# Altium PCB Circular PCB.PcbDoc (part 1 of 4)
Units mm, origin at the board's own origin, x right, y up, seen from the top; angles counter-clockwise.
Board outline 100 x 100 mm, 6 copper layers (Top Layer, GND (Top), X, Y, GND (Bot), Bottom Layer), stack 1.599 mm thick; 185 components, 119 nets, 581 pads, 159 vias.
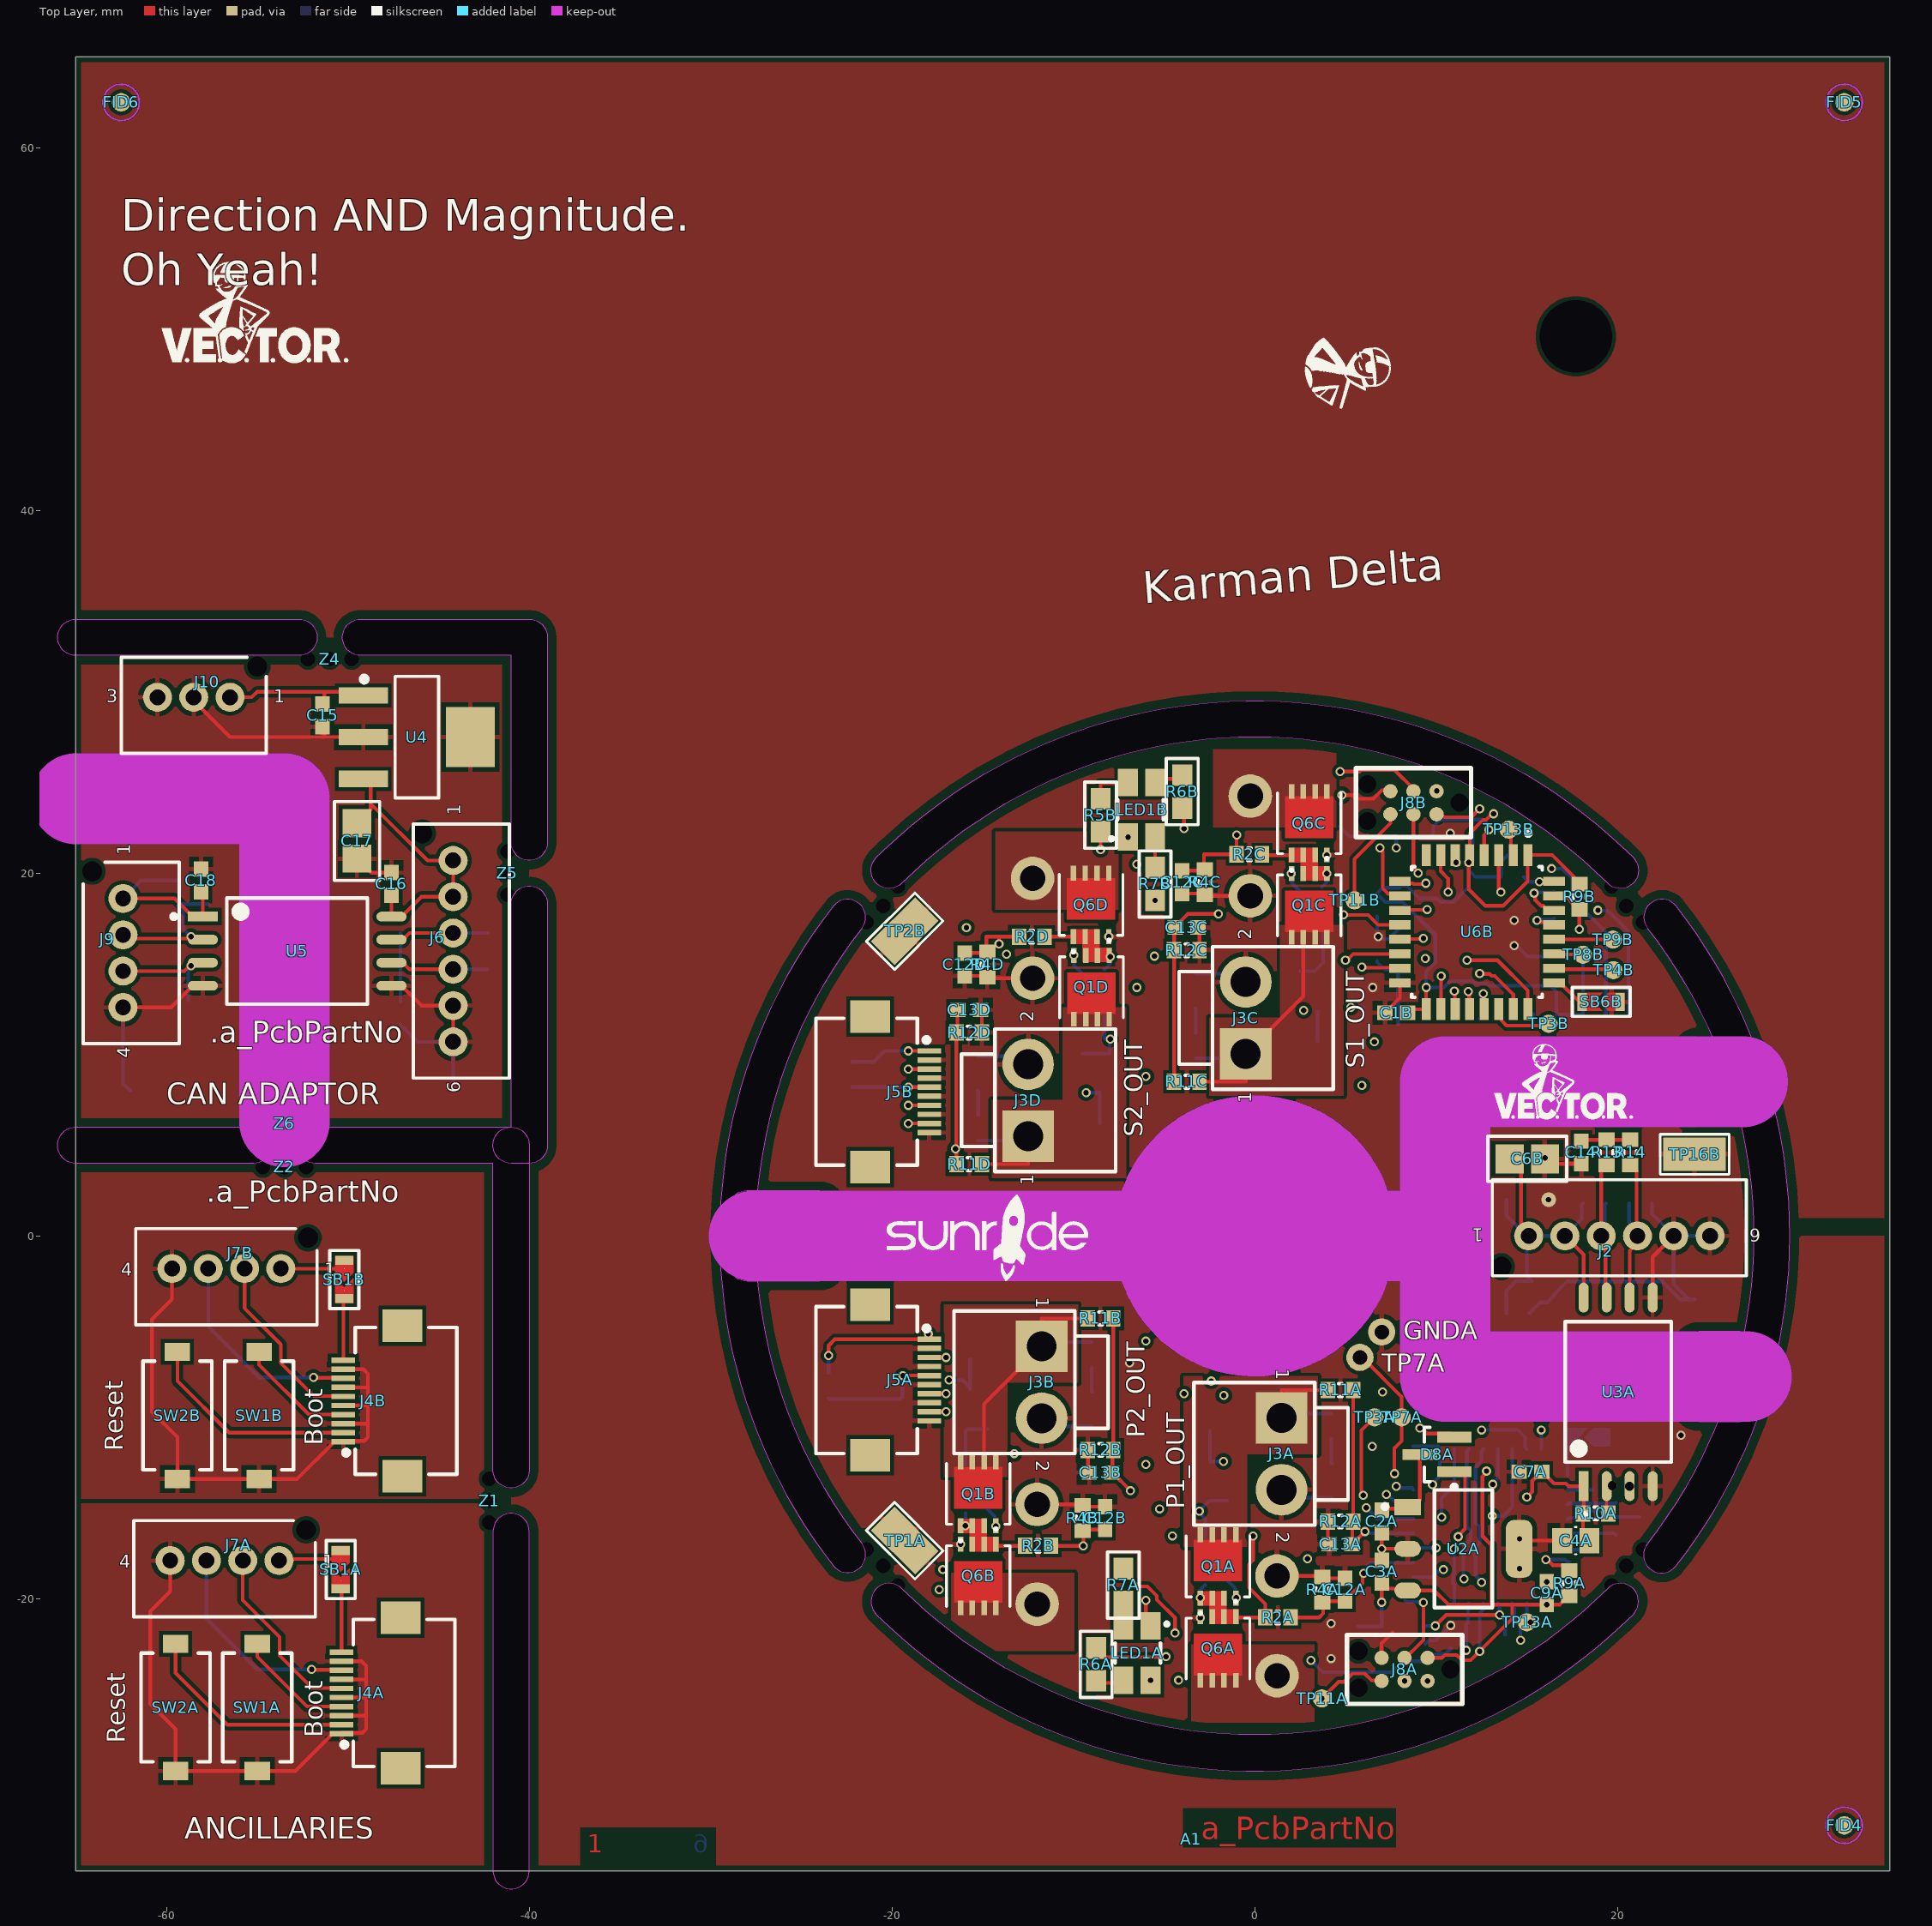
[diagram p0: Top Layer view]
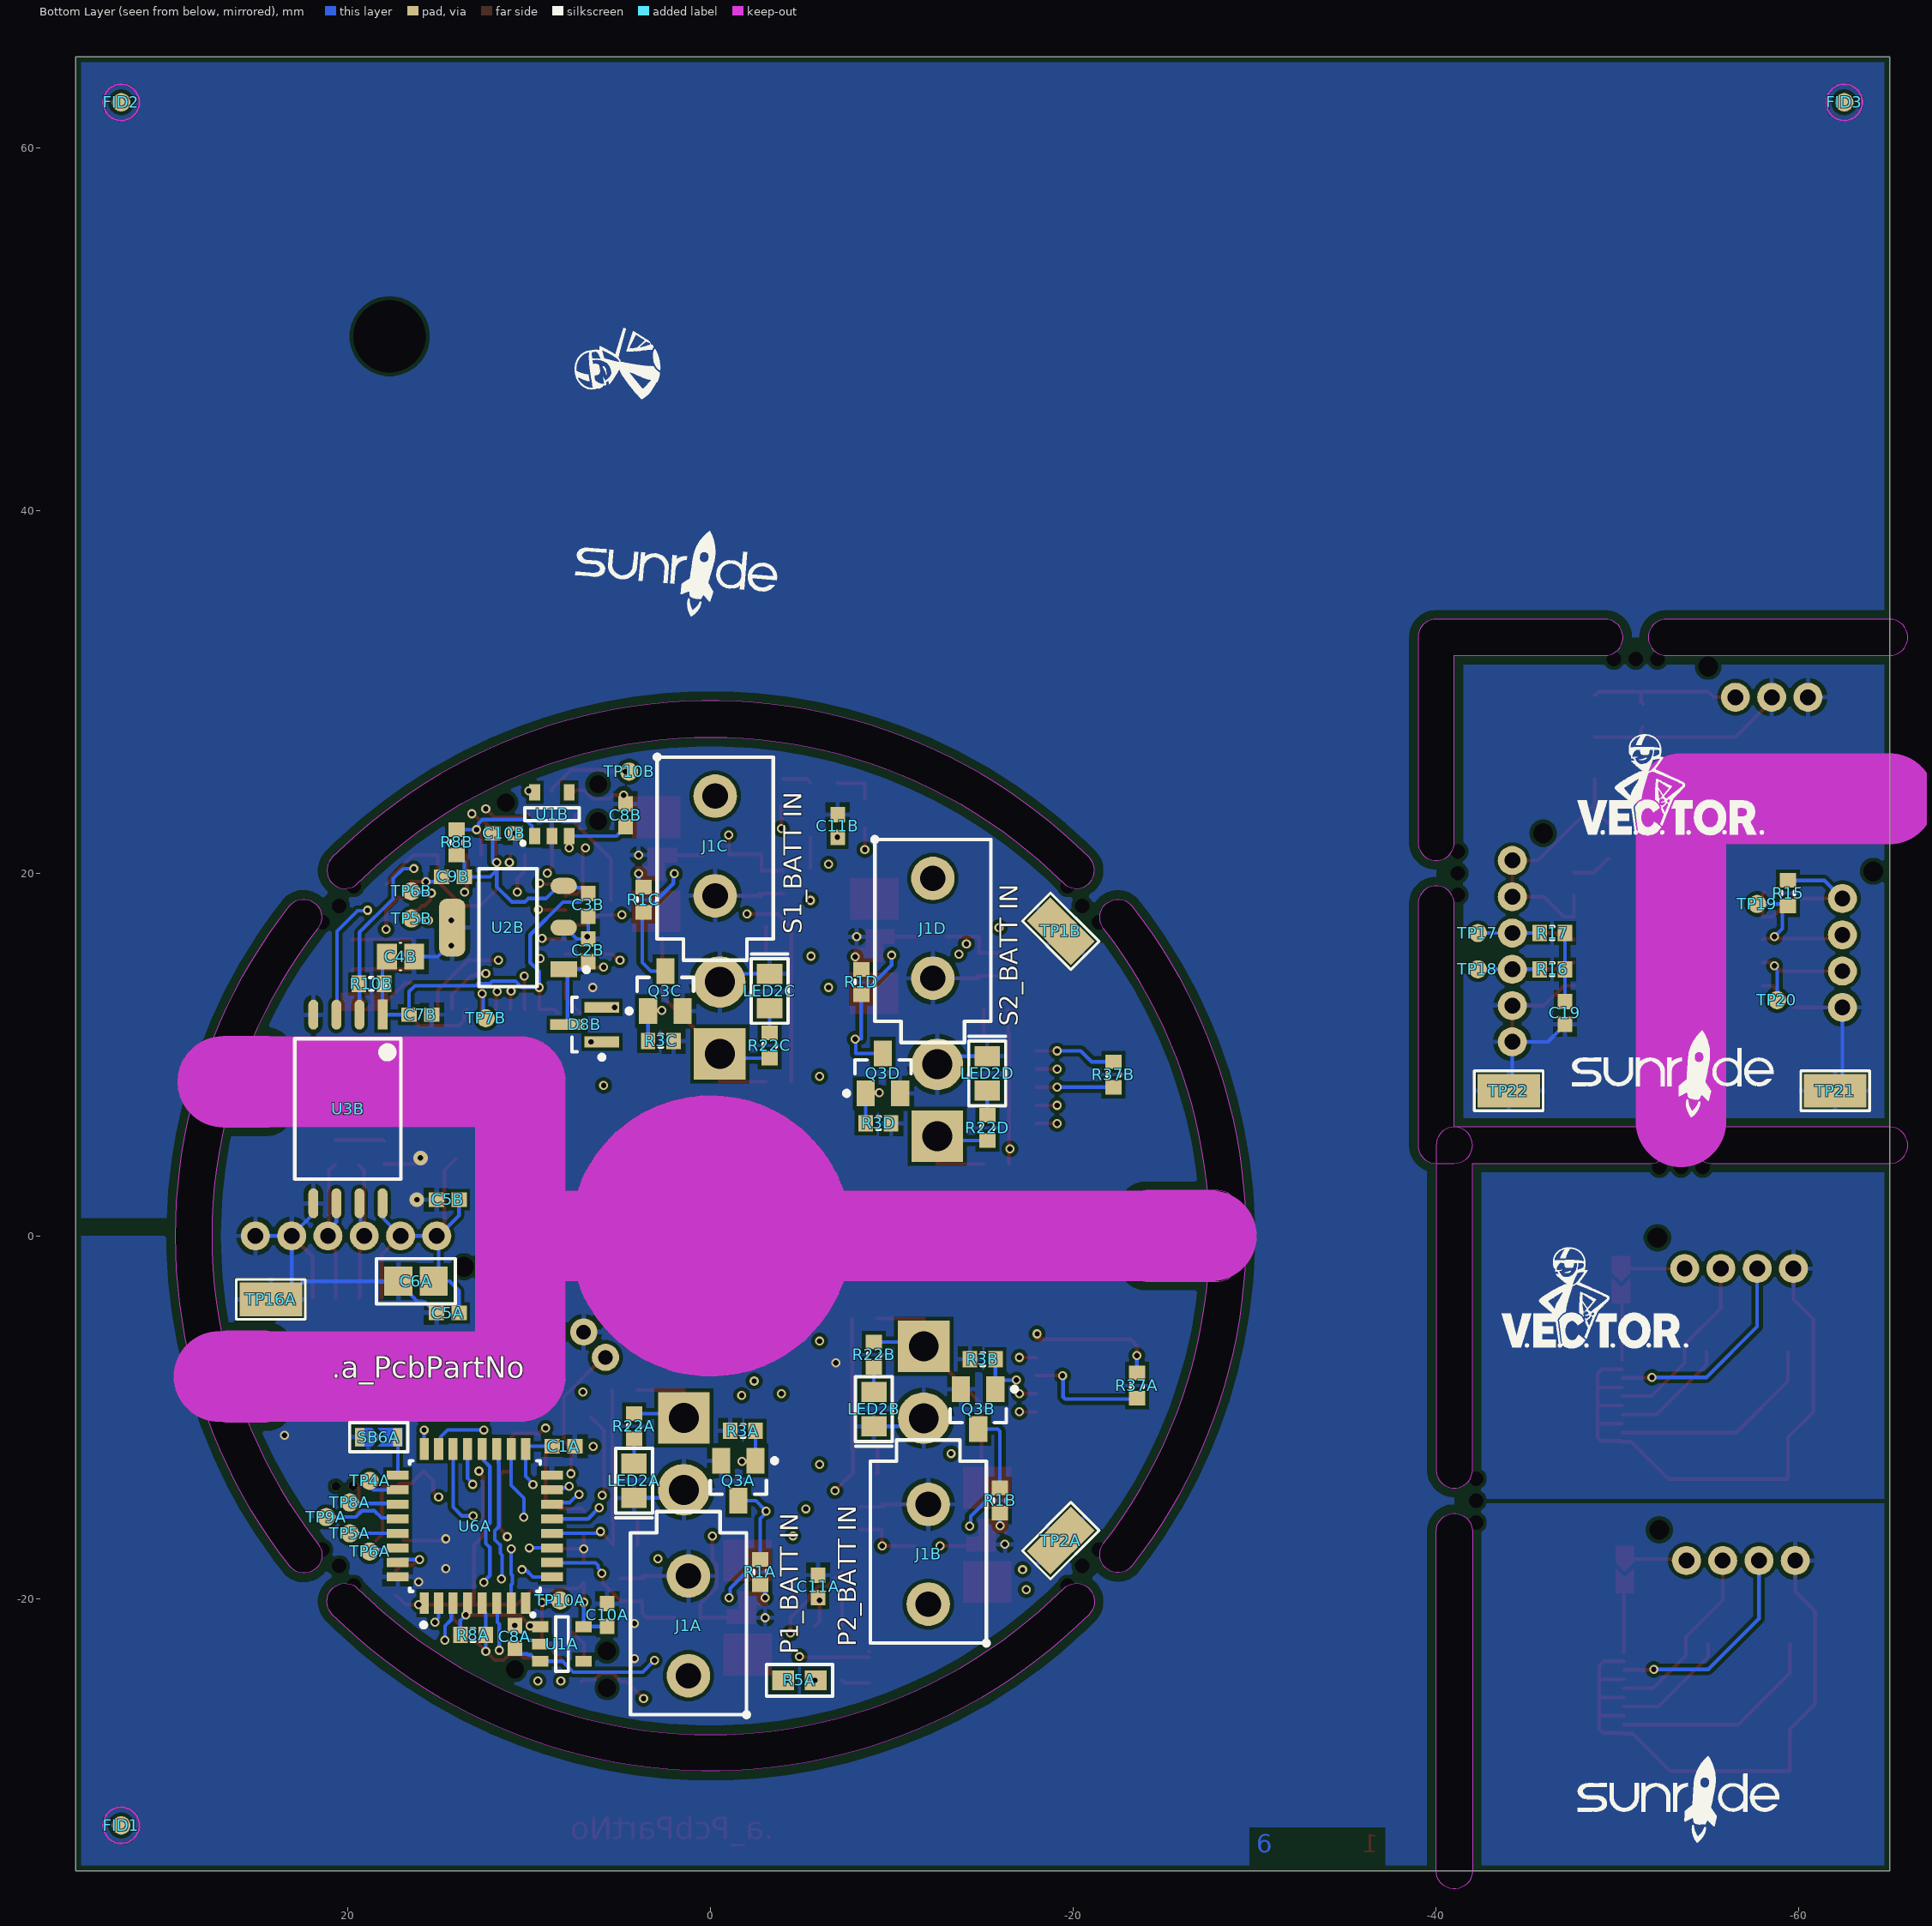
[diagram p1: Bottom Layer view, seen from below]
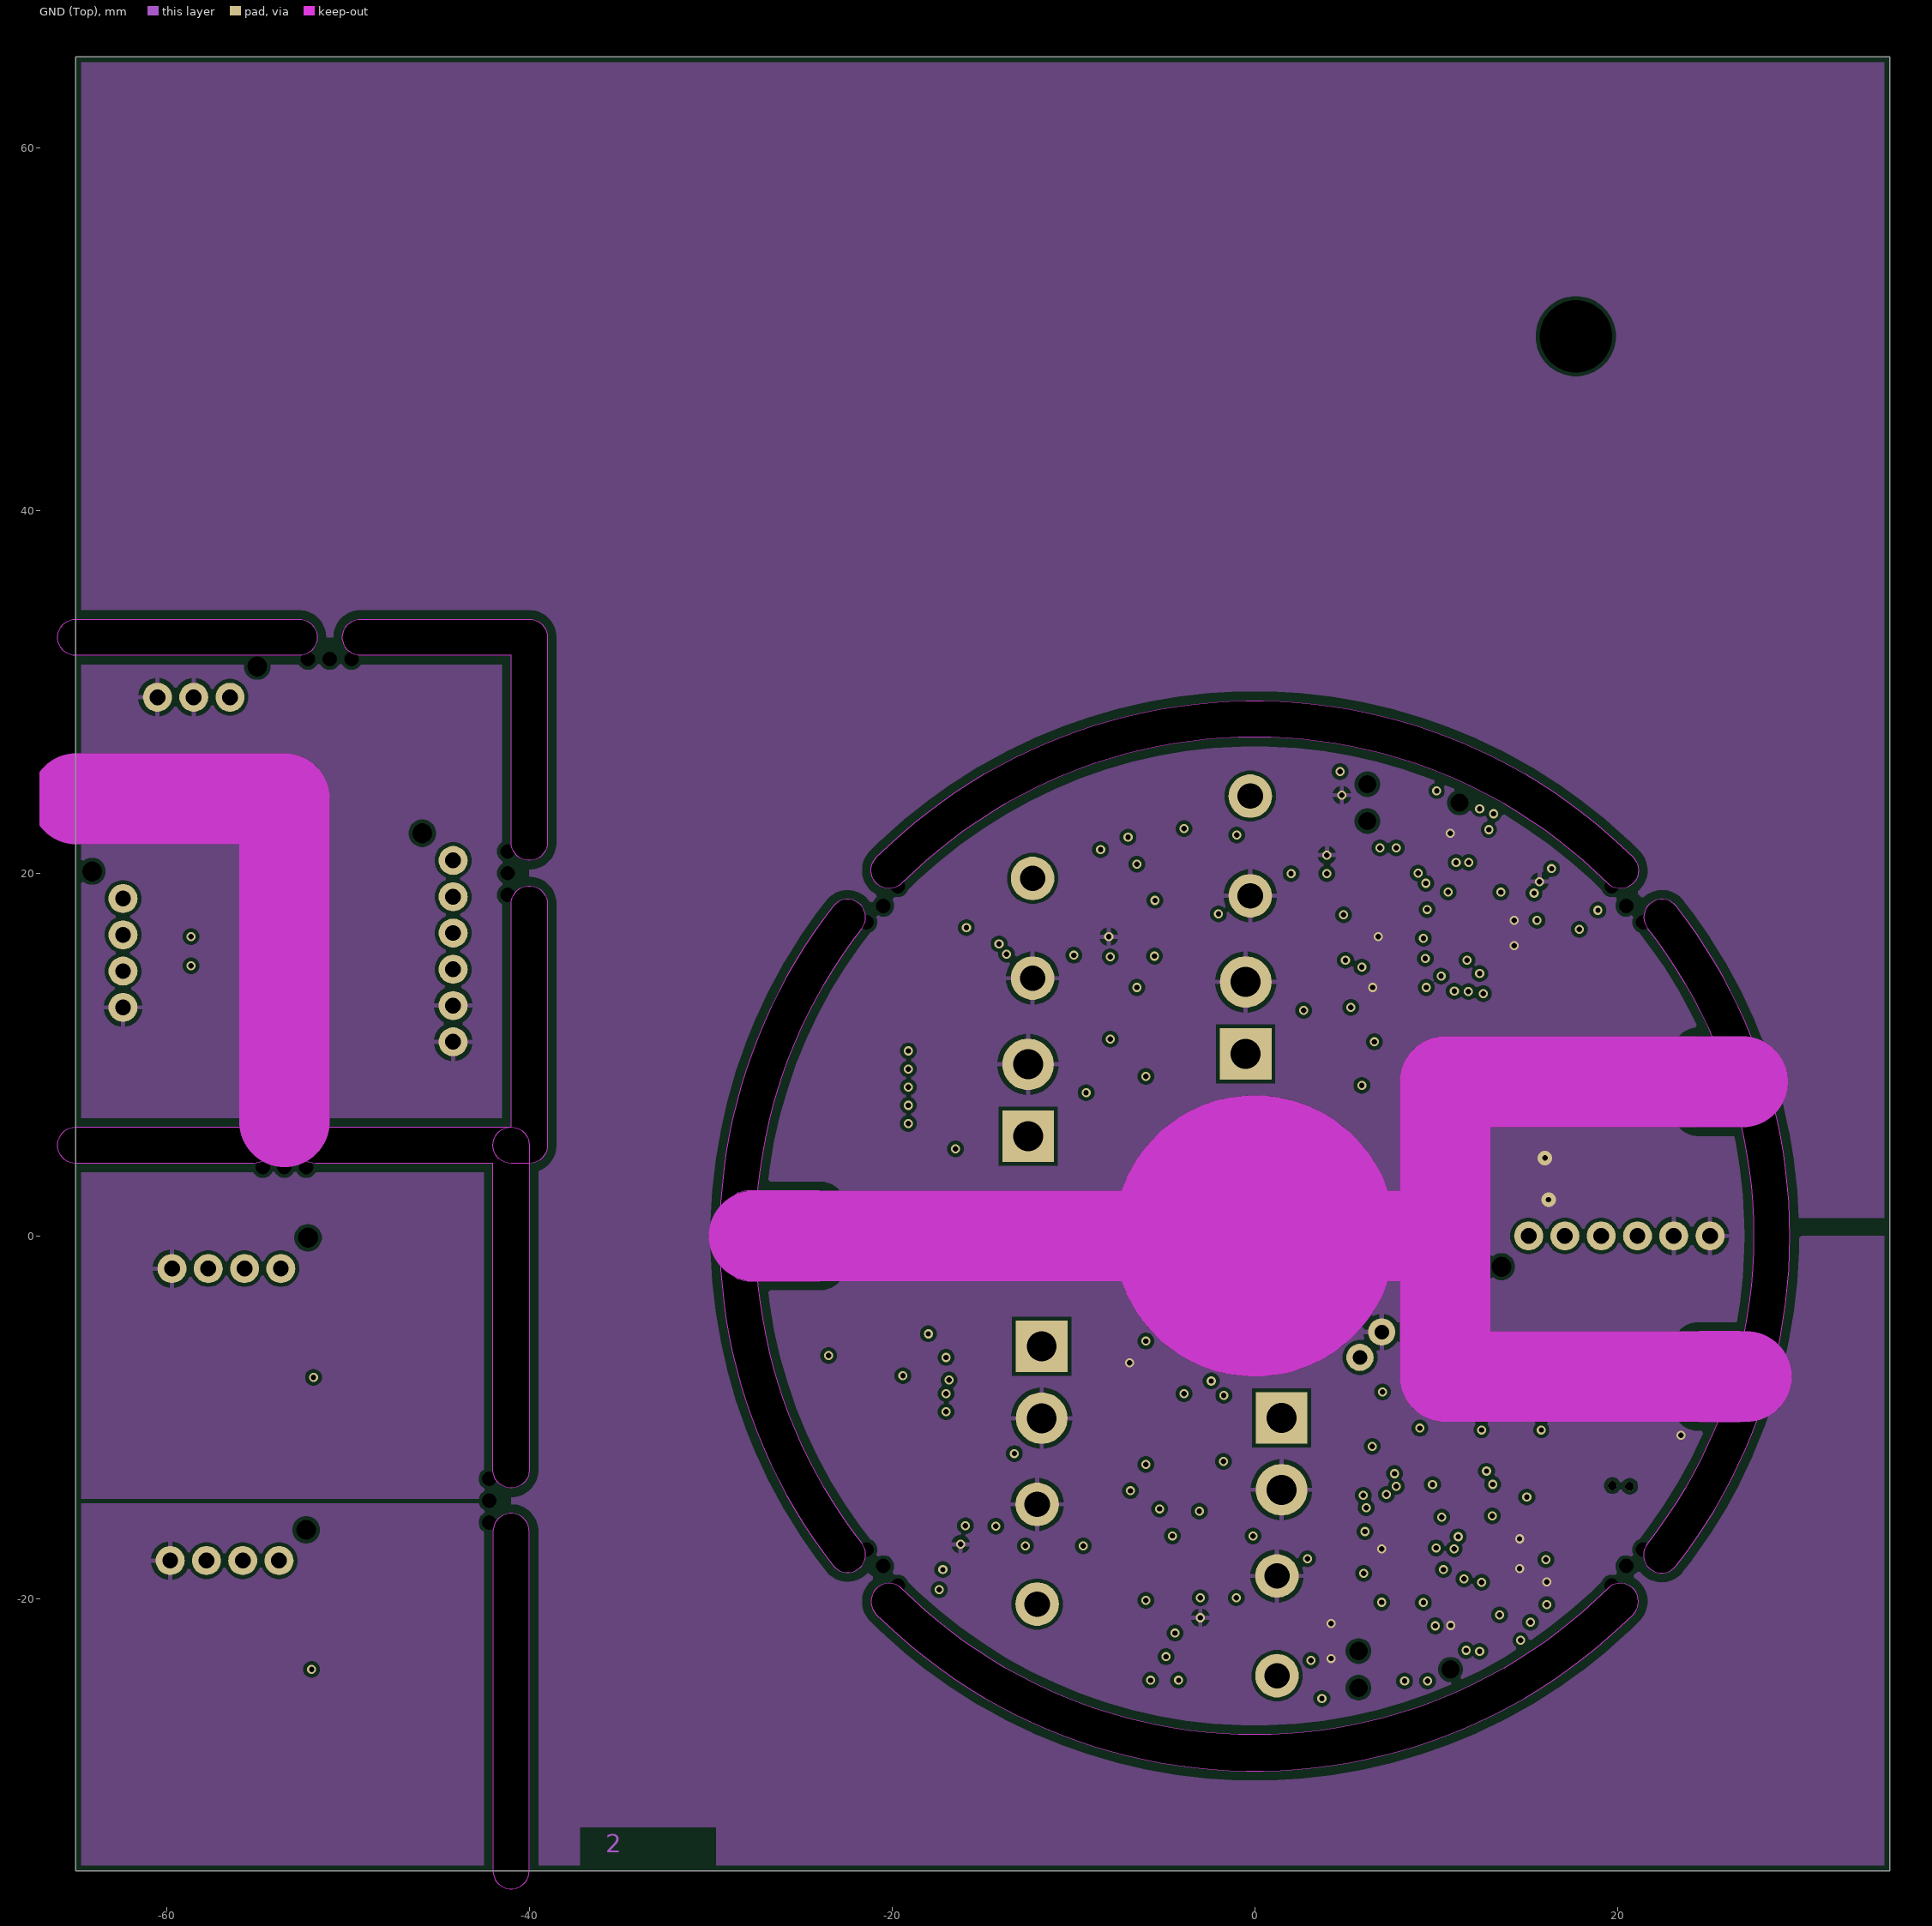
[diagram p2: GND (Top)]
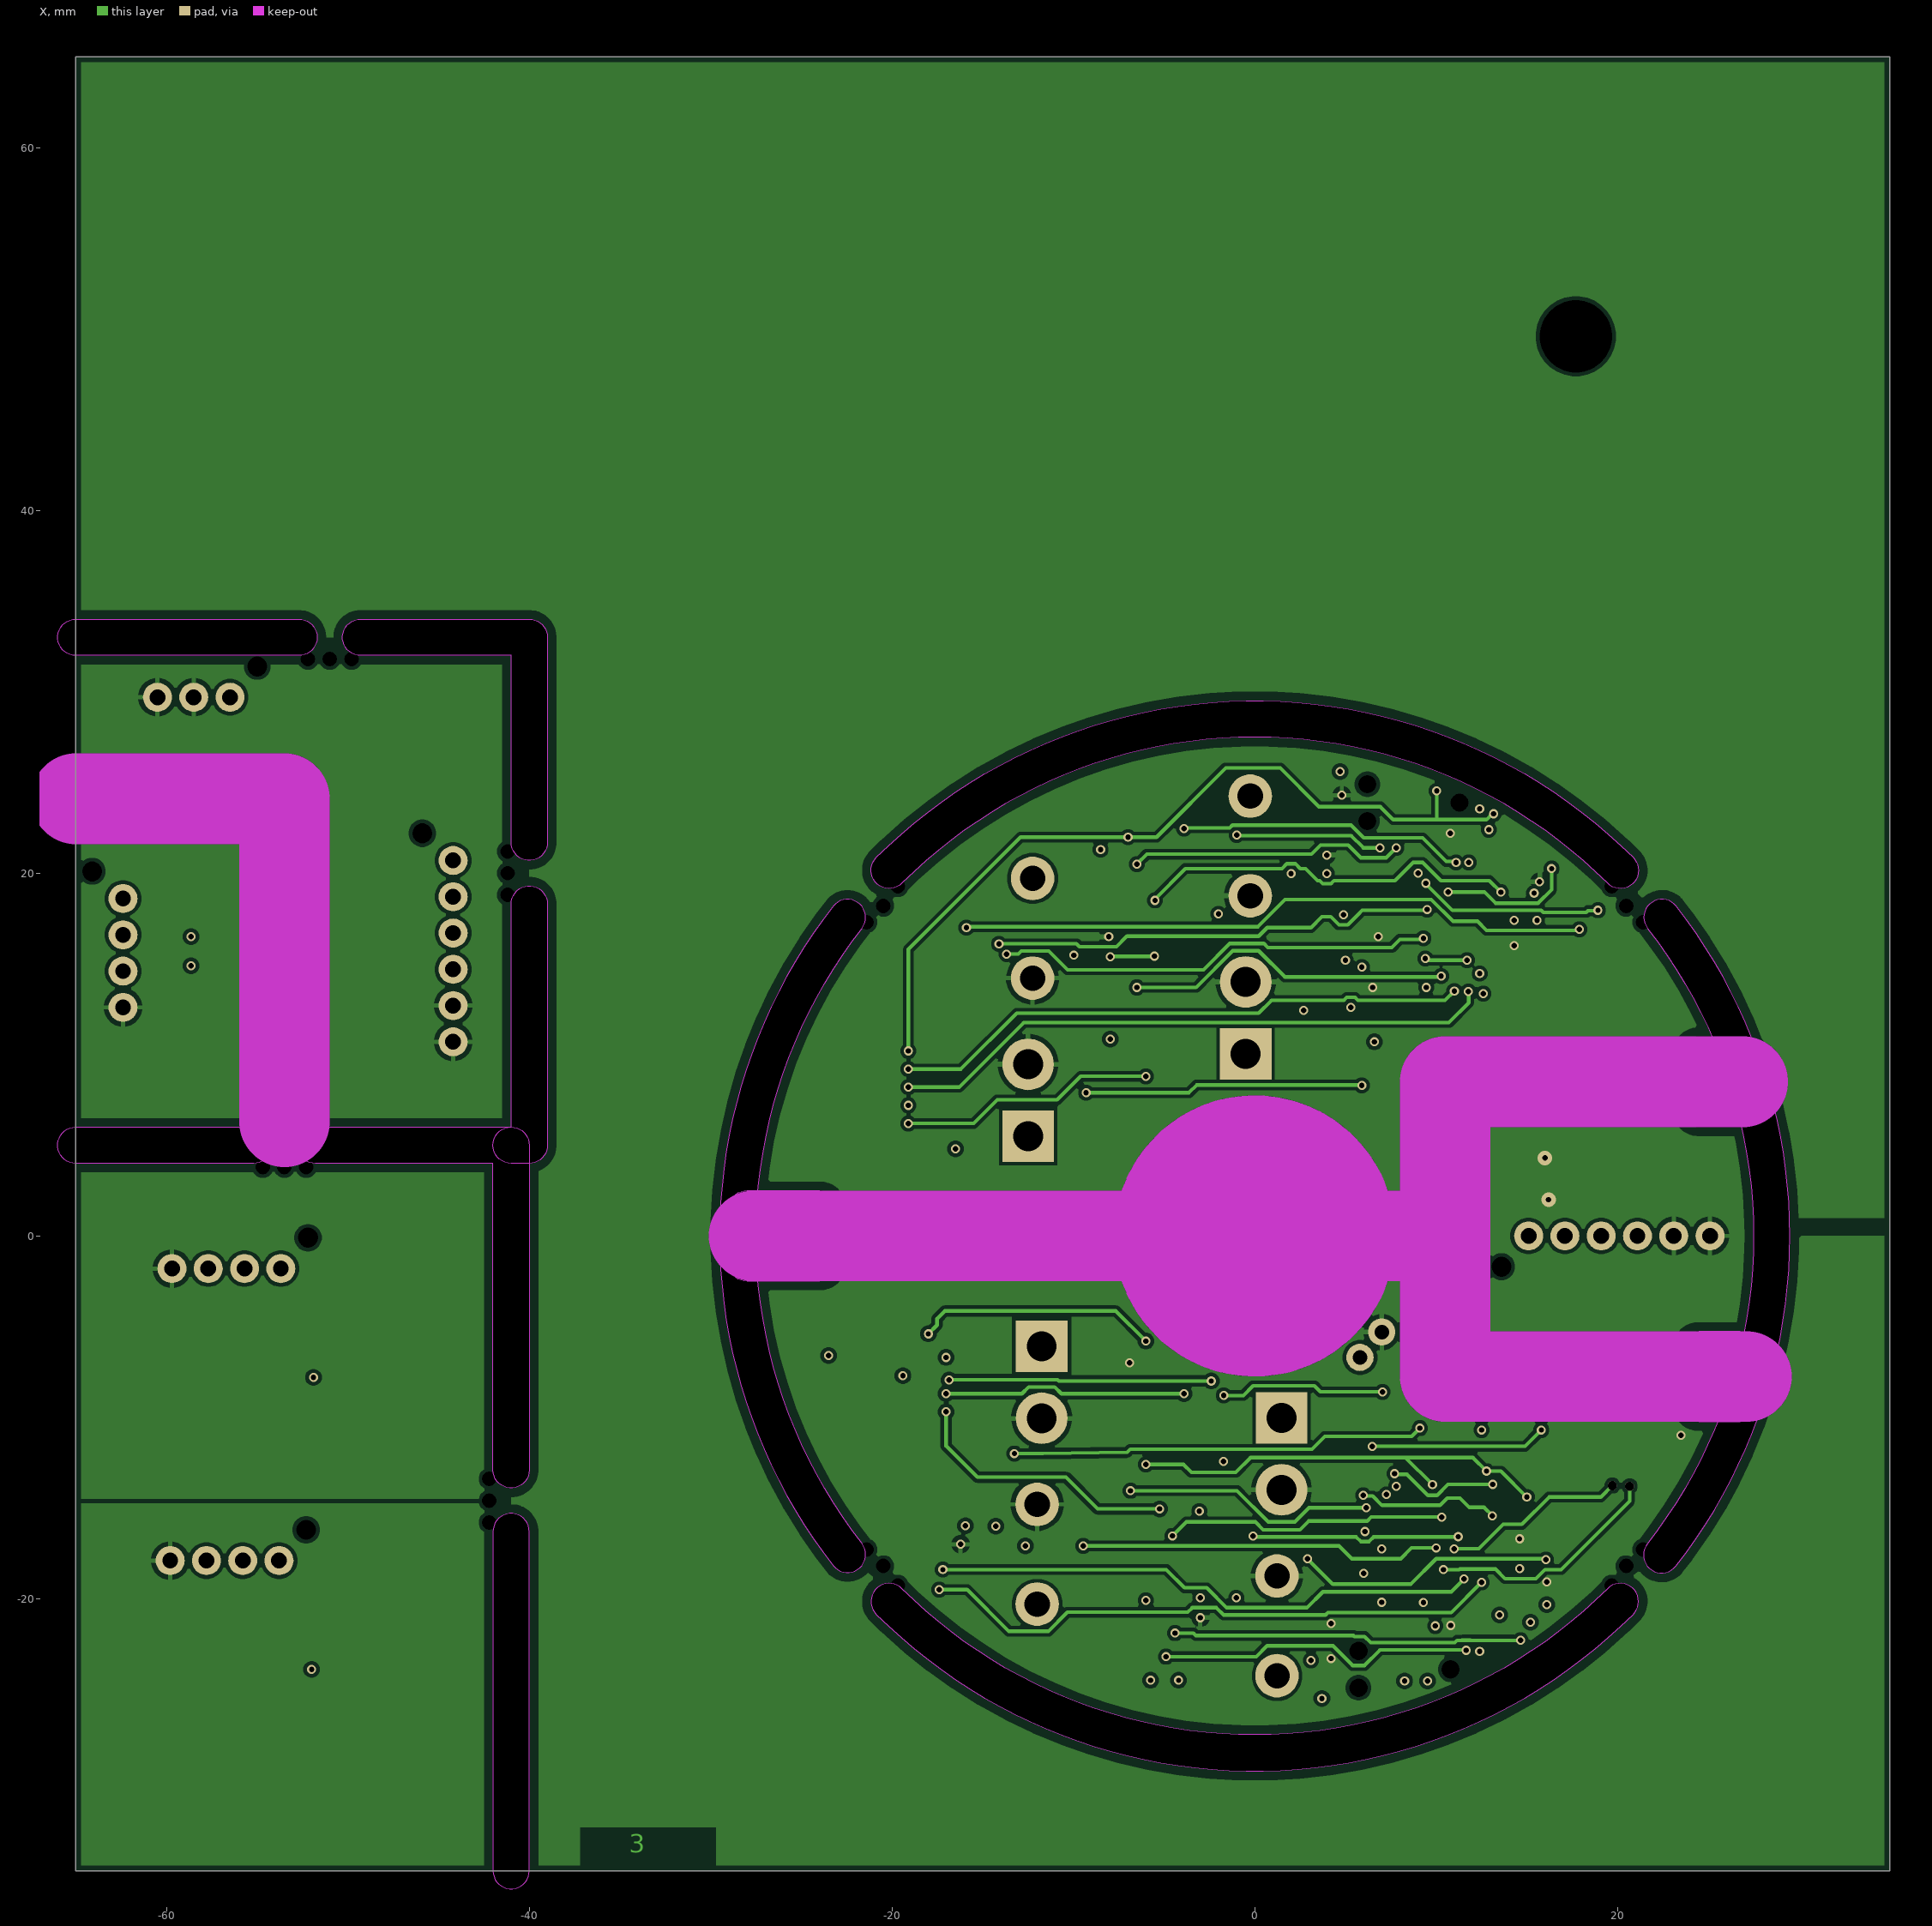
[diagram p3: X]
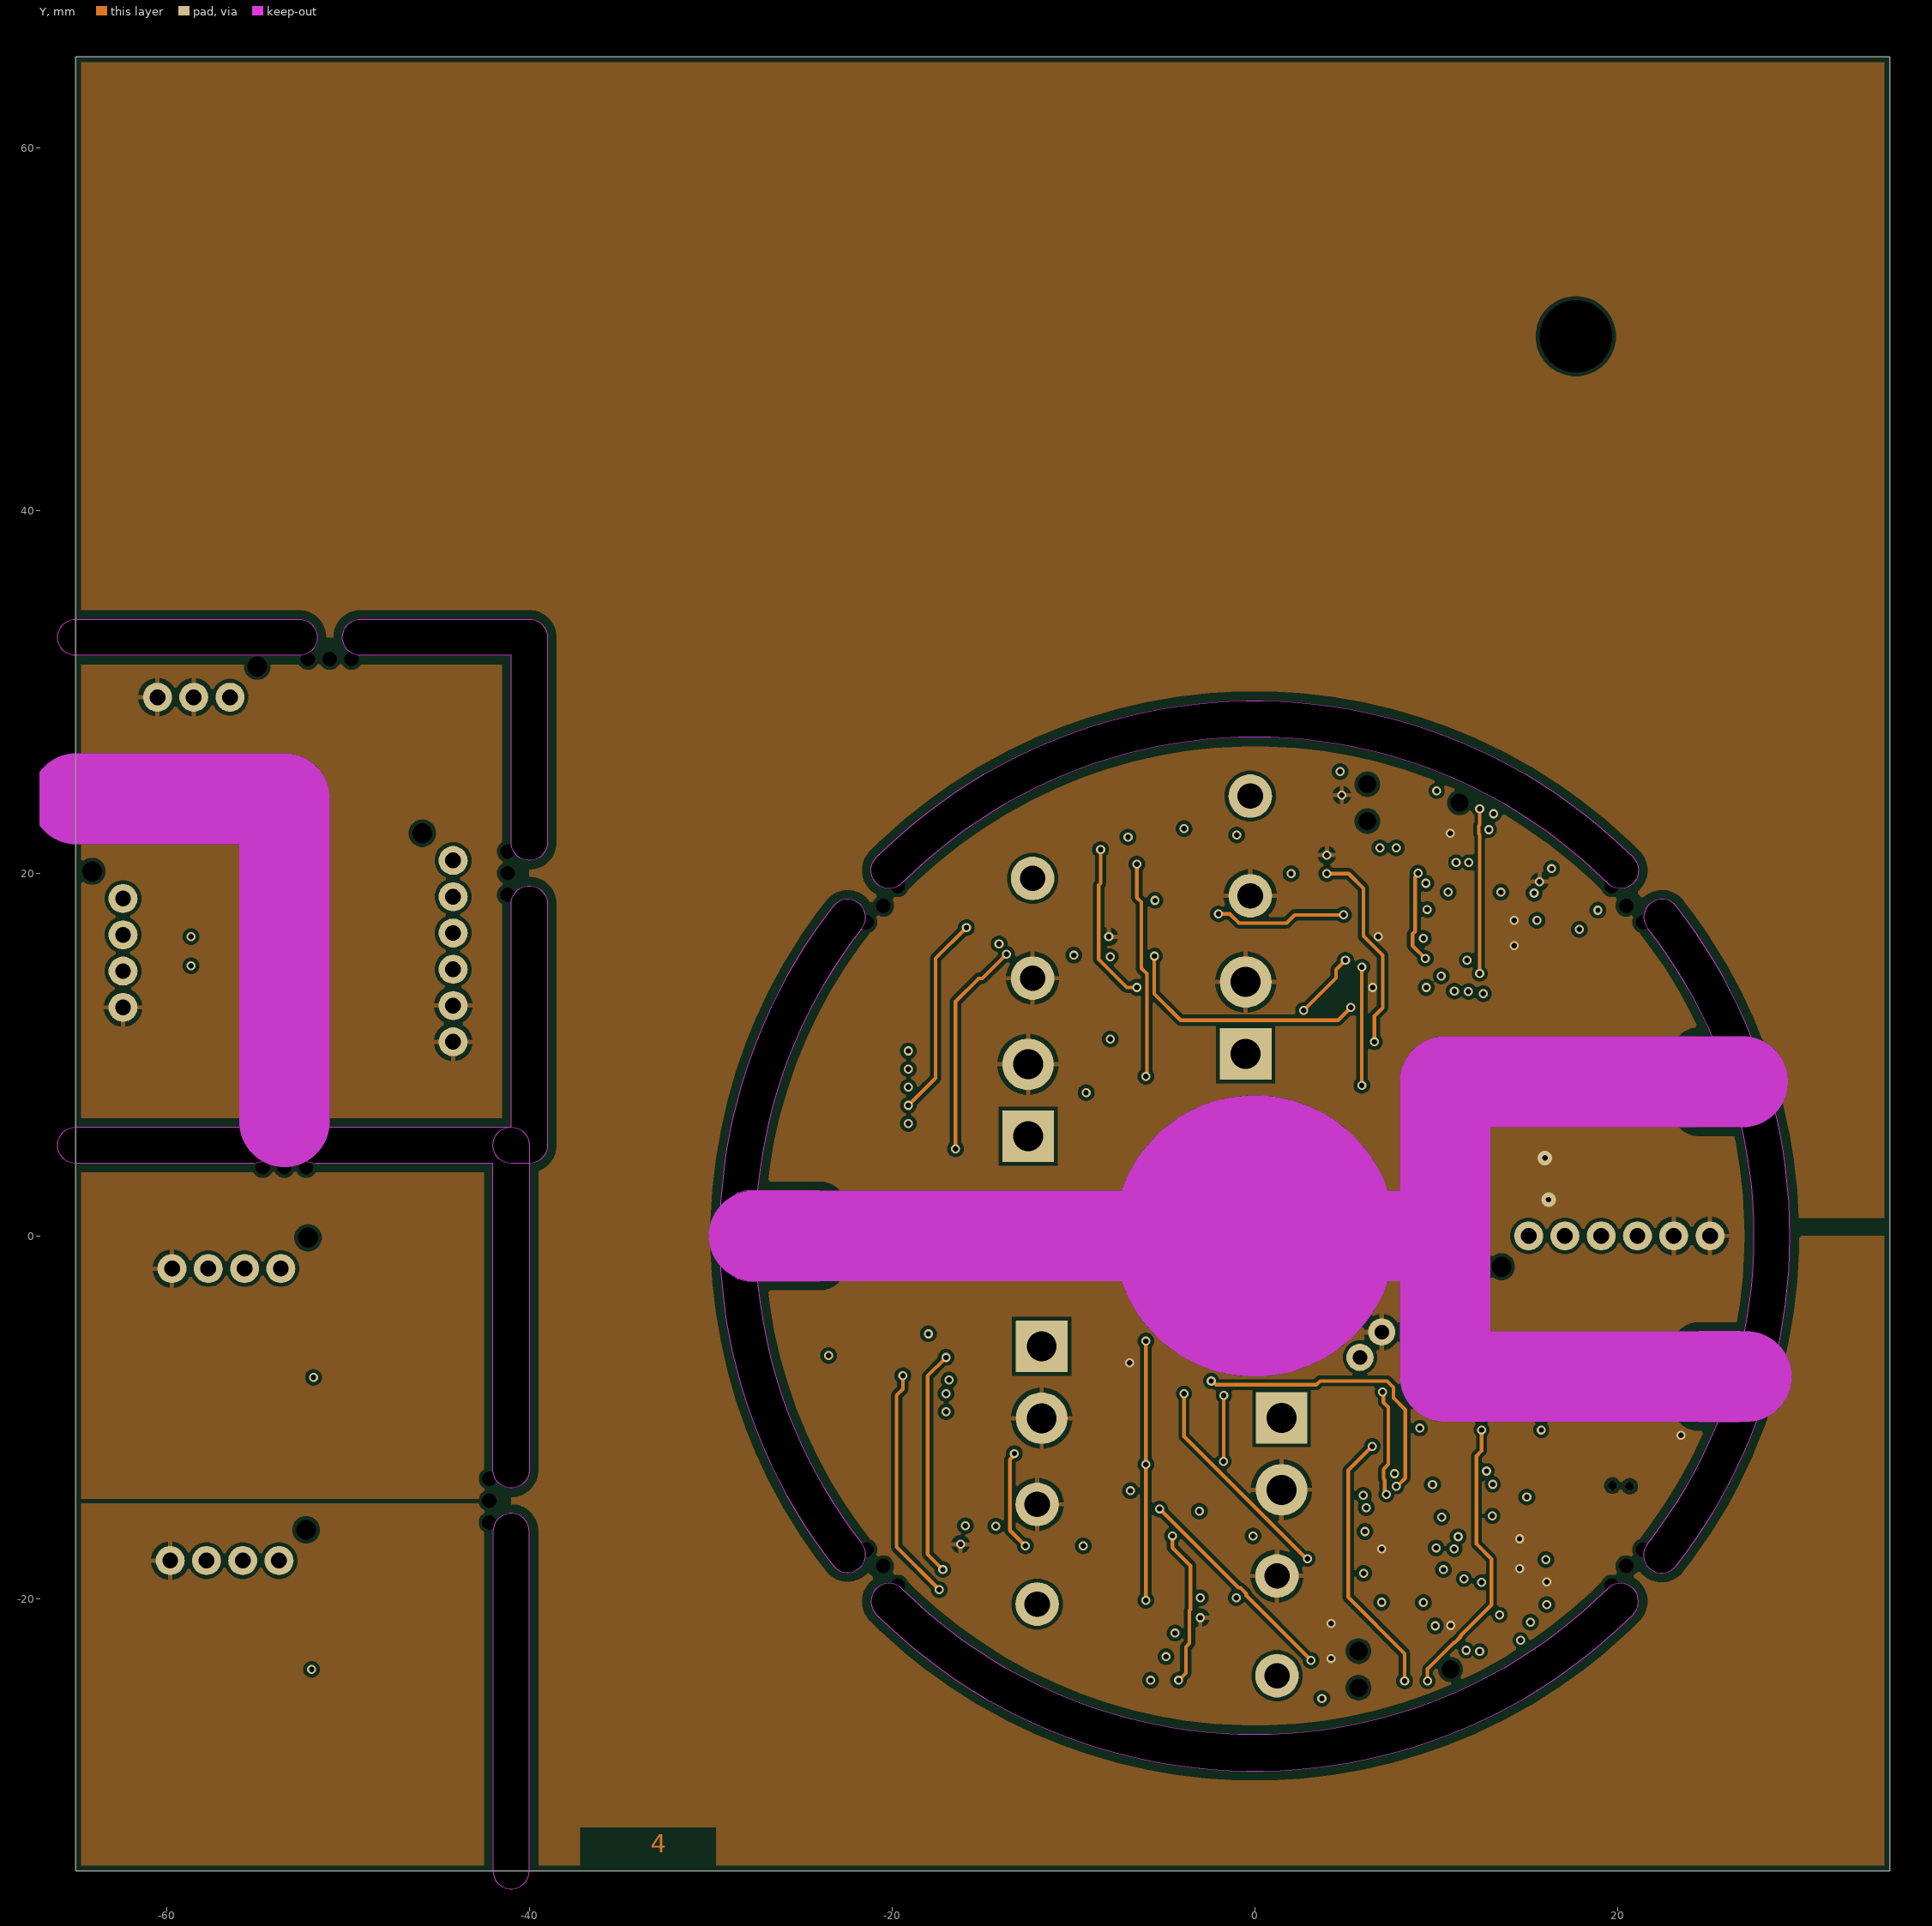
[diagram p4: Y]
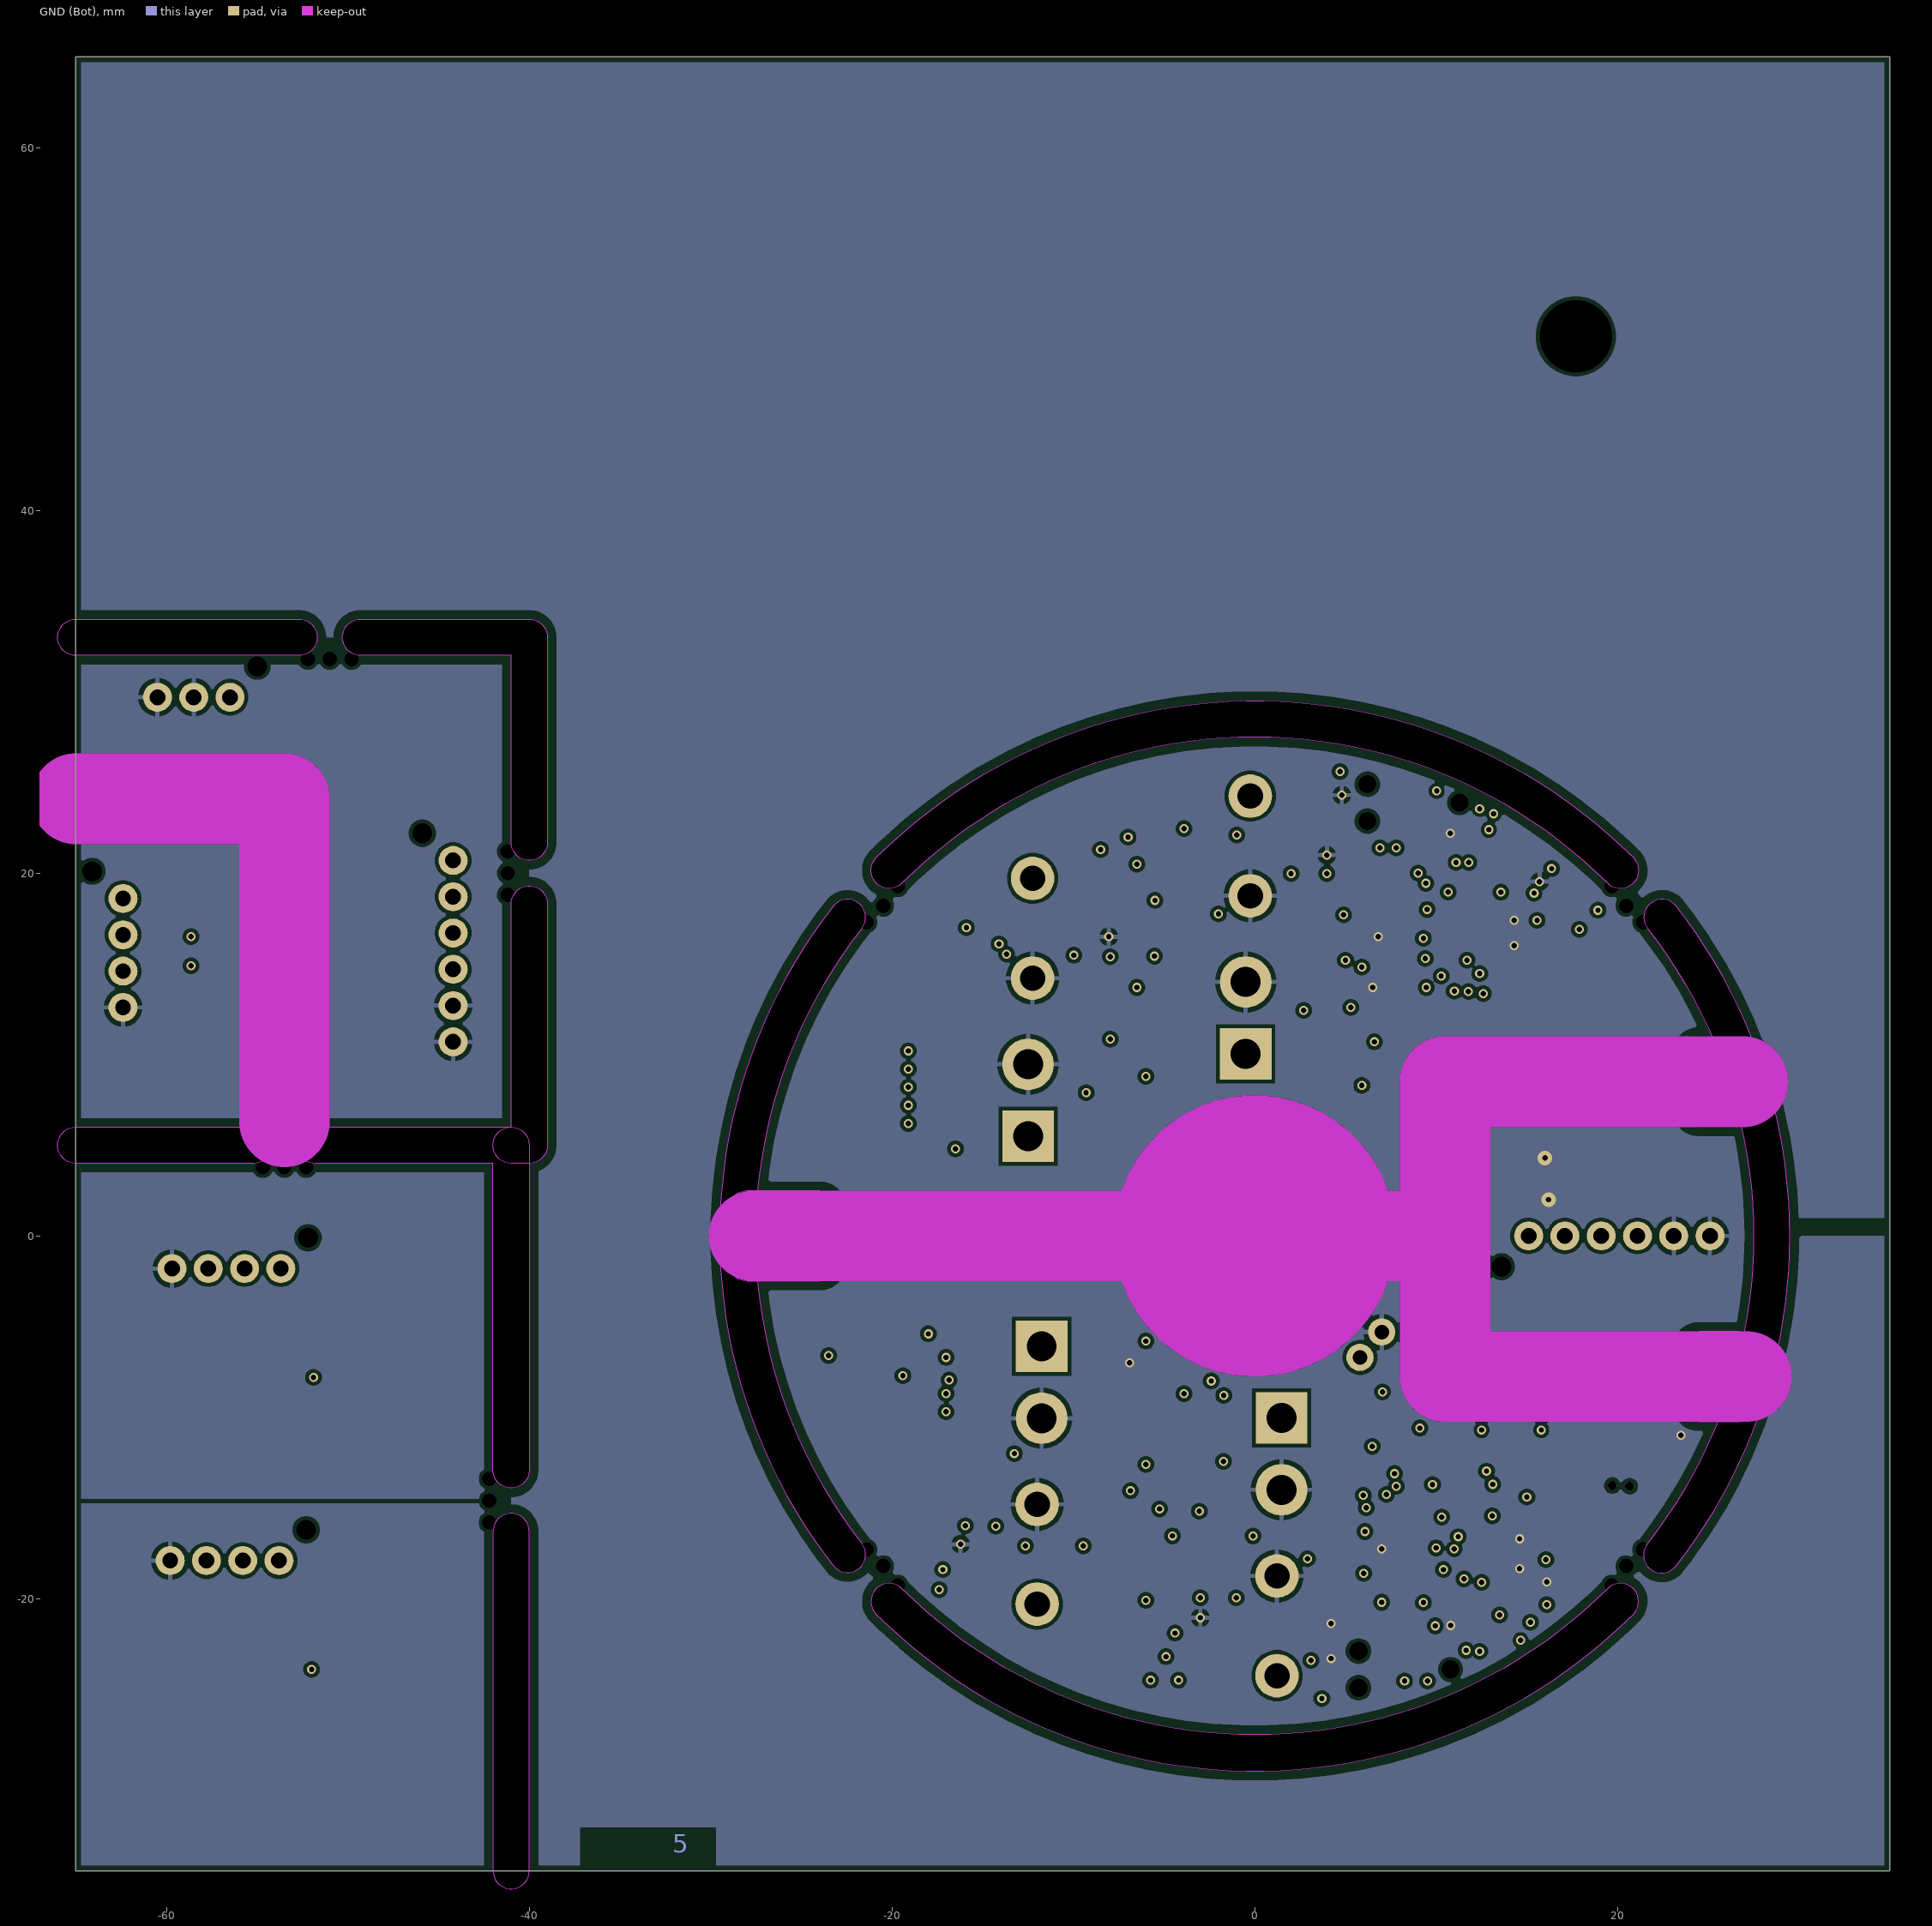
[diagram p5: GND (Bot)]
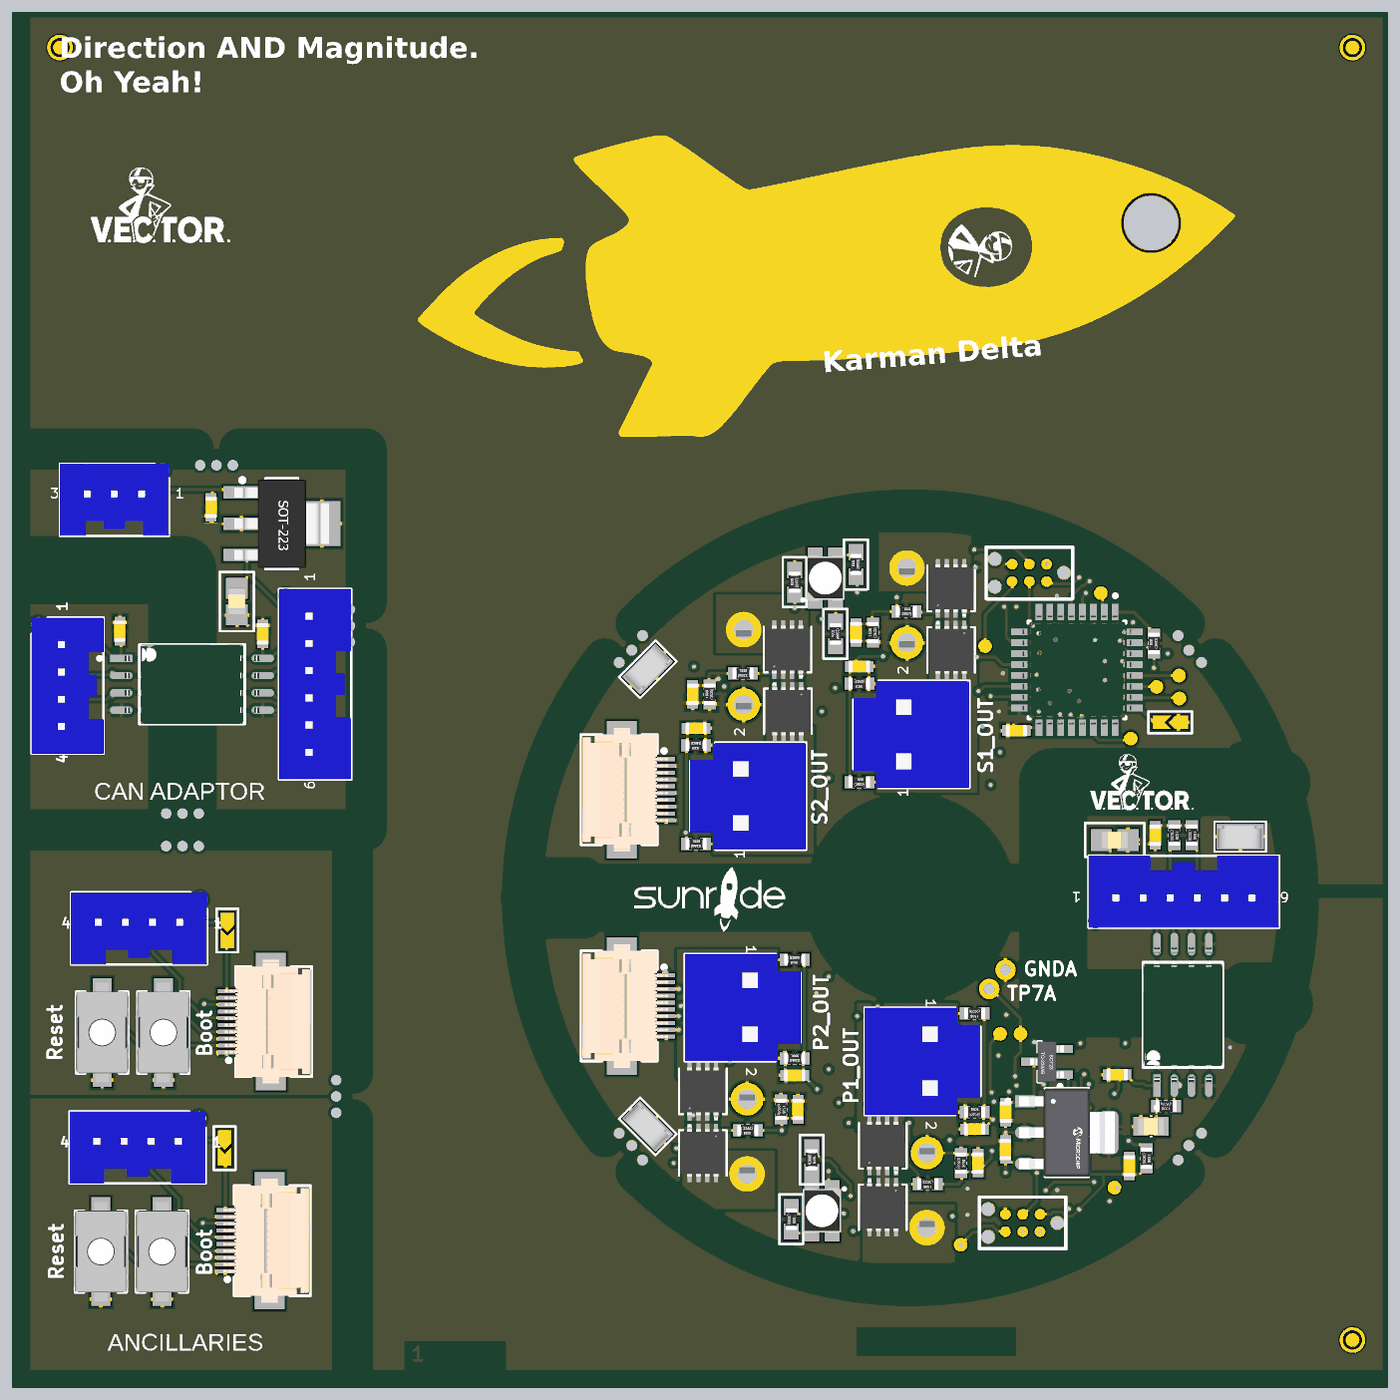
[diagram p8: 3D render of the assembled board from above, using the file's embedded part models]
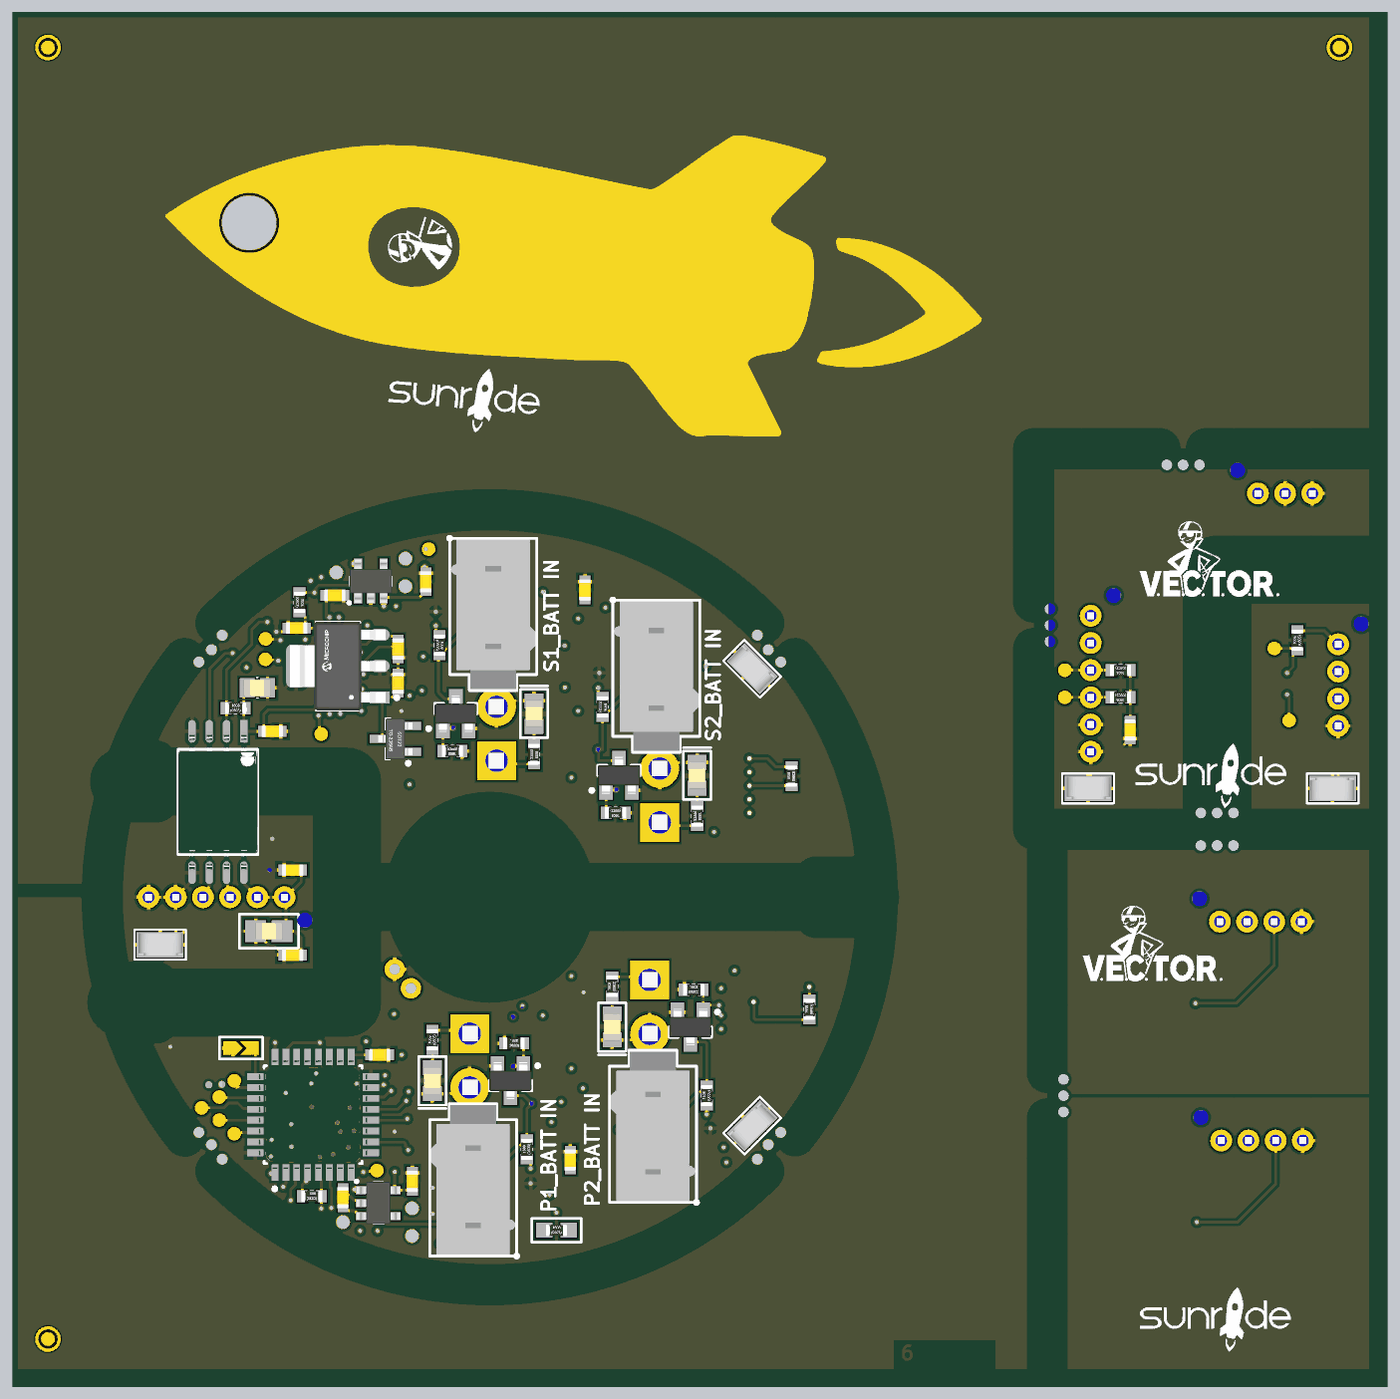
[diagram p9: 3D render of the assembled board from below, using the file's embedded part models]

## Layer stack, top to bottom
Top Solder: solder mask 0.0102, Solder Resist, Dk 3.5
Top Layer: signal copper 0.07
Dielectric 2: prepreg 0.0994, 3313*1, Dk 4.1
GND (Top): signal copper 0.0152
Dielectric 4: core 0.55, Core-009, Dk 4.5
X: signal copper 0.0152
Dielectric 1: prepreg 0.0994, 3313*1, Dk 4.8
Y: signal copper 0.0152
Dielectric 5: core 0.55, Core-009, Dk 4.5
GND (Bot): signal copper 0.0152
Dielectric 3: prepreg 0.0994, 3313*1, Dk 4.1
Bottom Layer: signal copper 0.07
Bottom Solder: solder mask 0.0102, Solder Resist, Dk 3.5

## Board outline
-65,-35 -65,65 35,65 35,-35
cut-out: -65,4 cw(c-65,5) -65,6 -55.2,6 cw(c-55.2,5) -54.2,5 cw(c-55.2,5) -55.2,4
cut-out: -41,4 cw(c-41,5) -41,6 -41,18.3 cw(c-40,18.3) -39,18.3 -39,5 cw(c-40,5) -40,4
cut-out: -49.3,32 cw(c-49.3,33) -49.3,34 -40,34 cw(c-40,33) -39,33 -39,21.7 cw(c-40,21.7) -41,21.7 -41,32
cut-out: -65,32 cw(c-65,33) -65,34 -52.7,34 cw(c-52.7,33) -51.7,33 cw(c-52.7,33) -52.7,32
cut-out: 24.5,-8.75 cw(c24.5,-7.75) 24.5,-6.75 26.75,-6.75 cw(c26.75,-7.75) 27.75,-7.75 cw(c26.75,-7.75) 26.75,-8.75
cut-out: 24.5,7.5 cw(c24.5,8.5) 24.5,9.5 26.75,9.5 cw(c26.75,8.5) 27.75,8.5 cw(c26.75,8.5) 26.75,7.5
cut-out: -28,-1 cw(c-28,0) -28,1 -24,1 cw(c-24,0) -23,0 cw(c-24,0) -24,-1
cut-out: -23.242,-18.175 ccw(c-22.454,-17.559) -21.454,-17.559 ccw(c-22.454,-17.559) -21.666,-16.942 cw(c0,0) -21.666,16.942 ccw(c-22.454,17.559) -21.454,17.559 ccw(c-22.454,17.559) -23.242,18.175 ccw(c0,0)
cut-out: 21.645,-16.969 ccw(c22.433,-17.586) 23.22,-18.204 ccw(c0,0) 29.505,0 ccw(c0,0) 23.24,18.178 ccw(c22.452,17.562) 21.664,16.946 cw(c0,0) 27.504,0 cw(c0,0)
cut-out: -42,-35 ccw(c-41,-35) -40,-35 -40,-16.3 ccw(c-41,-16.3) -42,-16.3
cut-out: -51.8,4 cw(c-51.8,5) -51.8,6 -41,6 cw(c-41,5) -40,5 -40,-12.9 cw(c-41,-12.9) -42,-12.9 -42,4
cut-out: -20.863,-20.863 ccw(c0,0) 20.863,-20.863 ccw(c20.156,-20.156) 21.156,-20.156 ccw(c20.156,-20.156) 19.448,-19.448 cw(c0,0) -19.448,-19.448 ccw(c-20.156,-20.156)
cut-out: -19.448,19.448 cw(c-20.156,20.156) -20.863,20.863 cw(c0,0) 20.863,20.863 cw(c20.156,20.156) 21.156,20.156 cw(c20.156,20.156) 19.448,19.448 ccw(c0,0)
cut-out: 23.5,7 23.5,10 cw(c24.5,10) 24.5,11 26.75,11 cw(c26.75,10) 27.75,10 cw(c26.75,10) 26.75,9 25.5,9 25.5,8 26.75,8 cw(c26.75,7) 27.75,7 cw(c26.75,7) 26.75,6 24.5,6 cw(c24.5,7)
cut-out: 23.5,-9.25 23.5,-6.25 cw(c24.5,-6.25) 24.5,-5.25 26.75,-5.25 cw(c26.75,-6.25) 27.75,-6.25 cw(c26.75,-6.25) 26.75,-7.25 25.5,-7.25 25.5,-8.25 26.75,-8.25 cw(c26.75,-9.25) 27.75,-9.25 cw(c26.75,-9.25) 26.75,-10.25 24.5,-10.25 cw(c24.5,-9.25)
cut-out: -28,-2.5 cw(c-28,-1.5) -28,-0.5 -25,-0.5 -25,0.5 -28,0.5 cw(c-28,1.5) -28,2.5 -24,2.5 cw(c-24,1.5) -23,1.5 -23,-1.5 cw(c-24,-1.5) -24,-2.5
cut-out: 0,-4.1 cw(c0,0) -4.1,0 cw(c0,0) 0,4.1 cw(c0,0) 4.1,0 cw(c0,0)

## Design rules (kind name [scope] priority, off if disabled: settings)
AssemblyTestPointUsage [All] p1: isadvanced=TRUE
AssemblyTestpoint [All] p1: isadvanced=TRUE testpointundercomponent=TRUE minsize=1.016 maxsize=2.54 preferedsize=1.524 minholesize=0 maxholesize=1.016 preferedholesize=0.813 testpointgrid=0.025 usegrid=TRUE gridtolerance=0 allowsidetop=TRUE allowsidebottom=TRUE
BoardOutlineClearance BoardOutlineClearance_Breakout [(HasFootprint('Breakout - 3 hole - short route'))] p1: isadvanced=TRUE gap=0 ignorepadtopadclearanceinfootprint=FALSE
BoardOutlineClearance [All] p2: isadvanced=TRUE gap=0.3 ignorepadtopadclearanceinfootprint=FALSE
Clearance "Clearance board cutout" [All vs IsBoardCutoutRegion] p1: isadvanced=TRUE gap=0.5 ignorepadtopadclearanceinfootprint=FALSE
Clearance "Clearance keep out" [IsKeepOut] p2: isadvanced=TRUE gap=0 ignorepadtopadclearanceinfootprint=FALSE
Clearance "Clearance general_1" [(ExistsOnLayer('GND (Top)') Or ExistsOnLayer('X') Or ExistsOnLayer('Y') Or ExistsOnLayer('GND (Bot)')) vs (ExistsOnLayer('GND (Top)') Or ExistsOnLayer('X') Or ExistsOnLayer('Y') Or ExistsOnLayer('GND (Bot)'))] p3: gap=0.2 ignorepadtopadclearanceinfootprint=FALSE sourcerule=51 cellrowname=All cellrowtype=0 cellcolname=All cellcoltype=0 innerlayers=TRUE
Clearance "Clearance general_2" [(ExistsOnLayer('Top Layer') Or ExistsOnLayer('Bottom Layer')) vs (ExistsOnLayer('Top Layer') Or ExistsOnLayer('Bottom Layer'))] p4: gap=0.2 ignorepadtopadclearanceinfootprint=FALSE sourcerule=51 cellrowname=All cellrowtype=0 cellcolname=All cellcoltype=0 outerlayers=TRUE
Clearance "Clearance general" [All] p5: gap=0.2 ignorepadtopadclearanceinfootprint=FALSE ismatrix=TRUE
ComponentClearance [All] p1: isadvanced=TRUE gap=0.254 collisioncheckmode=3 verticalgap=0.254 showdistances=FALSE
FabricationTestPointUsage [All] p1: isadvanced=TRUE valid=0 allowmultiple=FALSE
FabricationTestpoint [All] p1: isadvanced=TRUE side=3 testpointundercomponent=TRUE minsize=1.016 maxsize=2.54 preferedsize=1.524 minholesize=0 maxholesize=1.016 preferedholesize=0.813 testpointgrid=0.025 allowsidetop=TRUE allowsidebottom=TRUE usegrid=TRUE gridtolerance=0
FanoutControl Fanout_BGA [IsBGA] p1: isadvanced=TRUE bgadir=Out bgaviamode=Centered fanoutstyle=Auto fanoutdirection=Alternating viagrid=0.025 // Fanout_BGA (Default Rule)
FanoutControl Fanout_LCC [IsLCC] p2: isadvanced=TRUE bgadir=Out bgaviamode=Centered fanoutstyle=Auto fanoutdirection=Alternating viagrid=0.025 // Fanout_LCC (Default Rule)
FanoutControl Fanout_SOIC [IsSOIC] p3: isadvanced=TRUE bgadir=Out bgaviamode=Centered fanoutstyle=Auto fanoutdirection=Alternating viagrid=0.025 // Fanout_SOIC (Default Rule)
FanoutControl Fanout_Small [(CompPinCount < 5)] p4: isadvanced=TRUE bgadir=Out bgaviamode=Centered fanoutstyle=Auto fanoutdirection=OutThenIn viagrid=0.025 // Fanout_Small (Default Rule)
FanoutControl Fanout_Default [All] p5: isadvanced=TRUE bgadir=Out bgaviamode=Centered fanoutstyle=Auto fanoutdirection=Alternating viagrid=0.025 // Fanout_Default (Default Rule)
Height [All] p1: isadvanced=TRUE minheight=0 maxheight=25.4 prefheight=12.7
HoleSize [All] p1: isadvanced=TRUE absolutevalues=TRUE maxlimit=5 minlimit=0.3 maxpercent=80.000 minpercent=20.000
HoleToHoleClearance "Hole to board cutout" [All vs IsBoardOutline] p1: isadvanced=TRUE gap=0.5 allowstackedmicrovias=TRUE
HoleToHoleClearance [All] p2: isadvanced=TRUE gap=0.254 allowstackedmicrovias=TRUE
LayerPairs [All] p1: isadvanced=TRUE enforce=TRUE
MinimumSolderMaskSliver [All] p1: isadvanced=TRUE minsoldermaskwidth=0.2
NetAntennae [All] p1: isadvanced=TRUE netantennaetolerance=0
PasteMaskExpansion [All] p1: isadvanced=TRUE expansion=0
PlaneClearance [All] p1: isadvanced=TRUE clearance=0.508
PlaneConnect [All] p1: isadvanced=TRUE planeconnectstyle=Relief reliefexpansion=0.508 reliefentries=4 reliefconductorwidth=0.254 reliefairgap=0.254
PolygonConnect PolygonConnect_POWER [InNet('NetJ1D_1') or InNet('NetJ1C_1') or InNet('NetJ1B_1') or InNet('NetJ1A_1') or InNet('NetJ3D_1') or InNet('NetJ3C_1') or InNet('NetJ3B_1') or InNet('NetJ3A_1')] p1: isadvanced=TRUE connectstyle=Direct reliefconductorwidth=0.254 reliefentries=4 polygonreliefangle="90 Angle" airgapwidth=0.254
PolygonConnect PolygonConnect_1 [All] p2: connectstyle=Relief reliefconductorwidth=0.254 reliefentries=4 polygonreliefangle="90 Angle" airgapwidth=0.254
RoomDefinition "U_Output Stages_P1" [InComponentClass('U_Output Stages_P1')] p1: isadvanced=TRUE confinementstyle=ConfineIn formatcopy=TRUE lockcomponents=FALSE outline -4.489,-25.745 -4.489,-15.228 -4.029,-15.228 -4.029,-11.318 -3.939,-11.318 -3.939,-6.983 5.729,-6.983 5.729,-7.643 6.229,-7.643 6.229,-16.601 6.204,-16.601 6.204,-17.801 5.779,-17.801 5.779,-20.976 4.779,-20.976 4.779,-26.901 -2.479,-26.901 -2.479,-25.745
RoomDefinition U_AncillariesB [InComponentClass('U_AncillariesB')] p2: isadvanced=TRUE confinementstyle=ConfineIn formatcopy=FALSE lockcomponents=FALSE outline -63,-14.7 -43.4,-14.7 -43.4,1.2 -63,1.2
RoomDefinition U_AncillariesA [InComponentClass('U_AncillariesA')] p3: isadvanced=TRUE confinementstyle=ConfineIn formatcopy=TRUE lockcomponents=FALSE outline -63.1,-30.8 -43.5,-30.8 -43.5,-14.9 -63.1,-14.9
RoomDefinition "U_Output Stages_P2" [InComponentClass('U_Output Stages_P2')] p4: isadvanced=TRUE confinementstyle=ConfineIn formatcopy=FALSE lockcomponents=FALSE outline -17.714,-21.747 -17.714,-11.228 -17.254,-11.228 -17.254,-7.371 -17.164,-7.371 -17.164,-3.036 -7.496,-3.036 -7.496,-3.696 -6.996,-3.696 -6.996,-12.654 -7.021,-12.654 -7.021,-13.854 -7.446,-13.854 -7.446,-17.029 -8.446,-17.029 -8.446,-22.954 -15.704,-22.954 -15.704,-21.747
RoomDefinition "U_Output Stages_S1" [InComponentClass('U_Output Stages_S1')] p5: isadvanced=TRUE confinementstyle=ConfineIn formatcopy=FALSE lockcomponents=FALSE outline -5.254,7.646 -5.254,16.604 -5.229,16.604 -5.229,17.804 -4.804,17.804 -4.804,20.979 -3.804,20.979 -3.804,26.904 3.454,26.904 3.454,25.747 5.464,25.747 5.464,19.753 5.464,15.228 5.004,15.228 5.004,11.321 4.914,11.321 4.914,6.986 -4.754,6.986 -4.754,7.646
RoomDefinition "U_Output Stages_S2" [InComponentClass('U_Output Stages_S2')] p6: isadvanced=TRUE confinementstyle=ConfineIn formatcopy=FALSE lockcomponents=FALSE outline -17.254,3.106 -17.254,12.064 -17.229,12.064 -17.229,13.264 -16.804,13.264 -16.804,16.439 -15.804,16.439 -15.804,22.364 -8.546,22.364 -8.546,21.247 -6.561,21.247 -6.561,16.707 -6.536,16.707 -6.536,10.713 -6.996,10.713 -6.996,6.781 -7.086,6.781 -7.086,2.446 -16.754,2.446 -16.754,3.106
RoomDefinition Microcontroller_S [InComponentClass('Microcontroller_S')] p7: isadvanced=TRUE confinementstyle=ConfineIn formatcopy=TRUE lockcomponents=FALSE outline -24.8,1.1 26.5,1.1 26.5,26.6 -24.8,26.6
RoomDefinition Microcontroller_P [InComponentClass('Microcontroller_P')] p8: isadvanced=TRUE confinementstyle=ConfineIn formatcopy=TRUE lockcomponents=FALSE outline -24.8,-26.9 26.5,-26.9 26.5,-0.8 -24.8,-0.8
RoomDefinition "Top Sheet" [InComponentClass('Top Sheet')] p9: isadvanced=TRUE confinementstyle=ConfineIn formatcopy=TRUE lockcomponents=FALSE outline -63.9,-33.9 33.9,-33.9 33.9,63.9 -63.9,63.9
RoutingCorners [All] p1: isadvanced=TRUE cornerstyle=45-Degree minsetback=2.54 maxsetback=2.54
RoutingPriority [All] p1: isadvanced=TRUE routingpriority=0
RoutingVias [All] p1: holewidth=0.3 width=0.5 viastyle="Through Hole" minholewidth=0.3 minwidth=0.5 maxholewidth=0.3 maxwidth=0.5
ShortCircuit [All] p1: isadvanced=TRUE allowed=FALSE
SilkToSilkClearance [All] p1: isadvanced=TRUE silktosilkclearance=0.254
SilkToSolderMaskClearance [IsPad] p1: isadvanced=TRUE minsilkscreentomaskgap=0.254 clearancetoexposedcopper=TRUE
SolderMaskExpansion [All] p1: isadvanced=TRUE expansion=0.102 istentingtop=FALSE
UnRoutedNet [All] p1: isadvanced=TRUE
UnpouredPolygon [All] p1: isadvanced=TRUE
Width [All] p1: maxlimit=0.2 minlimit=0.2 preferedwidth=0.2 minimp=50.000000 maximp=50.000000 favimp=50.000000
4 further rules are at their usual default settings.

## Classes and differential pairs
net class "PC Comms Domain": 3V3 GND NetJ9_2 NetJ9_3
component class "U_CAN Adaptor": C15 C16 C17 C18 C19 J6 J9 J10 R15 R16 R17 TP17 TP18 TP19 TP20 TP21 TP22 U4 U5
net class "Top Sheet_Nets": NetC14_1
net class U_AncillariesB_Nets: NetJ4B_1 NetJ4B_2 NetJ4B_4 NetJ4B_6 NetJ4B_8 NetJ4B_10 NetJ7B_1
net class U_AncillariesA_Nets: NetJ4A_1 NetJ4A_2 NetJ4A_4 NetJ4A_6 NetJ4A_8 NetJ4A_10 NetJ7A_1
channel class Ancillaries: U_AncillariesA U_AncillariesB
component class U_AncillariesB: J4B J7B SB1B SW1B SW2B
component class U_AncillariesA: J4A J7A SB1A SW1A SW2A
net class "U_Output Stages_S2_Nets": NetJ1D_1 NetJ3D_1 NetLED2D_2 NetQ1D_4
net class "U_Output Stages_S1_Nets": NetJ1C_1 NetJ3C_1 NetLED2C_2 NetQ1C_4
net class "U_Output Stages_P2_Nets": NetJ1B_1 NetJ3B_1 NetLED2B_2 NetQ1B_4
net class "U_Output Stages_P1_Nets": NetJ1A_1 NetJ3A_1 NetLED2A_2 NetQ1A_4
net class Microcontroller_S_Nets: 3V3B BOOT0B LED_BLUEB LED_GREENB LED_REDB LPUART1_RXB LPUART1_TXB NetC2B_1 NetJ8B_3 NetJ8B_6 NetLED1B_2 NetLED1B_3 NetLED1B_4 NetSB6B_2 NetTP3B_1 NetTP4B_1 NetTP5B_1 NetTP6B_1 NetTP7B_1 NetTP8B_1 NetTP9B_1 NetTP13B_1 NetU1B_4 NRSTB RST_SWB SWCLKB SWDIOB USART2_RXB USART2_TXB
net class Microcontroller_P_Nets: 3V3A BOOT0A LED_BLUEA LED_GREENA LED_REDA LPUART1_RXA LPUART1_TXA NetC2A_1 NetJ8A_3 NetJ8A_6 NetLED1A_2 NetLED1A_3 NetLED1A_4 NetSB6A_2 NetTP3A_1 NetTP4A_1 NetTP5A_1 NetTP6A_1 NetTP7A_1 NetTP8A_1 NetTP9A_1 NetTP13A_1 NetU1A_4 NRSTA RST_SWA SWCLKA SWDIOA USART2_RXA USART2_TXA
net class Reused: 3V3A 3V3B BOOT0A BOOT0B GNDA GNDB LED_BLUEA LED_BLUEB LED_GREENA LED_GREENB LED_REDA LED_REDB LPUART1_RXA LPUART1_RXB LPUART1_TXA LPUART1_TXB NetC2A_1 NetC2B_1 NetJ1A_1 NetJ1A_2 NetJ1B_1 NetJ1B_2 NetJ1C_1 NetJ1C_2 NetJ1D_1 NetJ1D_2 NetJ3A_1 NetJ3B_1 NetJ3C_1 NetJ3D_1 NetJ4A_1 NetJ4A_2 NetJ4A_4 NetJ4A_6 NetJ4A_8 NetJ4A_10 NetJ4B_1 NetJ4B_2 NetJ4B_4 NetJ4B_6 NetJ4B_8 NetJ4B_10 NetJ7A_1 NetJ7B_1 NetJ8A_3 NetJ8A_6 NetJ8B_3 NetJ8B_6 NetLED1A_2 NetLED1A_3 NetLED1A_4 NetLED1B_2 NetLED1B_3 NetLED1B_4 NetLED2A_2 NetLED2B_2 NetLED2C_2 NetLED2D_2 NetQ1A_4 NetQ1B_4 NetQ1C_4 NetQ1D_4 NetSB6A_2 NetSB6B_2 NetTP3A_1 NetTP3B_1 NetTP4A_1 NetTP4B_1 NetTP5A_1 NetTP5B_1 NetTP6A_1 NetTP6B_1 NetTP7A_1 NetTP7B_1 NetTP8A_1 NetTP8B_1 NetTP9A_1 NetTP9B_1 NetTP13A_1 NetTP13B_1 NetU1A_4 NetU1B_4 NRSTA NRSTB PRIMARY_OUT_EN_1 PRIMARY_OUT_EN_2 PRIMARY_OUT_SENSE_1 PRIMARY_OUT_SENSE_2 PRIMARY_VBATT_1 PRIMARY_VBATT_2 PRIMARY_VBATT_SENSE_1 PRIMARY_VBATT_SENSE_2 RST_SWA RST_SWB SECONDARY_OUT_EN_1 SECONDARY_OUT_EN_2 SECONDARY_OUT_SENSE_1 SECONDARY_OUT_SENSE_2 SECONDARY_VBATT_1 SECONDARY_VBATT_2 SECONDARY_VBATT_SENSE_1 SECONDARY_VBATT_SENSE_2 SWCLKA SWCLKB SWDIOA SWDIOB USART2_RXA USART2_RXB USART2_TXA USART2_TXB
component class "U_Output Stages_S2": C12D C13D J1D J3D LED2D Q1D Q3D Q6D R1D R2D R3D R4D R11D R12D R22D
component class Microcontroller_P: C1A C2A C3A C4A C5A C6A C7A C8A C9A C10A C11A D8A J5A J8A LED1A R5A R6A R7A R8A R9A R10A R37A SB6A TP1A TP2A TP3A TP4A TP5A TP6A TP7A TP8A TP9A TP10A TP11A TP13A TP16A U1A U2A U3A U6A
channel class Microcontroller: Microcontroller_P Microcontroller_S
net class "Primary Power Domain": GNDA NetJ1A_1 NetJ1A_2 NetJ1B_1 NetJ1B_2 NetJ3A_1 NetJ3B_1 NetLED2A_2 NetLED2B_2 NetQ1A_4 NetQ1B_4 PRIMARY_OUT_EN_1 PRIMARY_OUT_EN_2 PRIMARY_OUT_SENSE_1 PRIMARY_OUT_SENSE_2 PRIMARY_VBATT_1 PRIMARY_VBATT_2 PRIMARY_VBATT_SENSE_1 PRIMARY_VBATT_SENSE_2
net class "Secondary Power Domain": GNDB NetJ1C_1 NetJ1C_2 NetJ1D_1 NetJ1D_2 NetJ3C_1 NetJ3D_1 NetLED2C_2 NetLED2D_2 NetQ1C_4 NetQ1D_4 SECONDARY_OUT_EN_1 SECONDARY_OUT_EN_2 SECONDARY_OUT_SENSE_1 SECONDARY_OUT_SENSE_2 SECONDARY_VBATT_1 SECONDARY_VBATT_2 SECONDARY_VBATT_SENSE_1 SECONDARY_VBATT_SENSE_2
net class "Isolated Comms Domain": 9V_BATT CANHA CANLA ISO_5V ISO_5VA ISO_GND ISO_GNDA NetC14_1 NetC19_1 NetJ6_3 NetJ6_4
component class "U_Output Stages_P1": C12A C13A J1A J3A LED2A Q1A Q3A Q6A R1A R2A R3A R4A R11A R12A R22A
component class Microcontroller_S: C1B C2B C3B C4B C5B C6B C7B C8B C9B C10B C11B D8B J5B J8B LED1B R5B R6B R7B R8B R9B R10B R37B SB6B TP1B TP2B TP3B TP4B TP5B TP6B TP7B TP8B TP9B TP10B TP11B TP13B TP16B U1B U2B U3B U6B
channel class "Output Stages": "U_Output Stages_P1" "U_Output Stages_P2" "U_Output Stages_S1" "U_Output Stages_S2"
component class "U_Output Stages_S1": C12C C13C J1C J3C LED2C Q1C Q3C Q6C R1C R2C R3C R4C R11C R12C R22C
component class "U_Output Stages_P2": C12B C13B J1B J3B LED2B Q1B Q3B Q6B R1B R2B R3B R4B R11B R12B R22B
component class "Top Sheet": A1 C14 FID1 FID2 FID3 FID4 FID5 FID6 J2 R13 R14 Z1 Z2 Z4 Z5 Z6

## Components (designator, comment, footprint, x,y, rotation, side; value= is the part's Value field where it differs from the comment)
A1 "*" PCB -3.5,-33.25 r0 top
C1A "*" CAPC1608X08L 8.1,-11.6 r180 bottom value=100nF (schematic designator C1)
C1B "*" CAPC1608X08L 7.8,12.3 r180 top value=100nF (schematic designator C1)
C2A "*" CAPC1608X08L 7,-15.75 r270 top value=100nF (schematic designator C2)
C2B "*" CAPC1608X08L 6.75,15.75 r90 bottom value=100nF (schematic designator C2)
C3A "*" CAPC1608X08L 7,-18.5 r90 top value=100nF (schematic designator C3)
C3B "*" CAPC1608X08L 6.75,18.25 r270 bottom value=100nF (schematic designator C3)
C4A "CAP" CAPC2012X15L 17.7,-16.8 r180 top value=100uF (schematic designator C4)
C4B "CAP" CAPC2012X15L 17.1,15.4 r180 bottom value=100uF (schematic designator C4)
C5A "*" CAPC1608X08L 14.5,-4.25 r0 bottom value=100nF (schematic designator C5)
C5B "*" CAPC1608X08L 14.5,2 r0 bottom value=100nF (schematic designator C5)
C6A "*" CAPC2012X15M 16.25,-2.5 r0 bottom value=10uF (schematic designator C6)
C6B "*" CAPC2012X15M 15.025,4.25 r0 top value=10uF (schematic designator C6)
C7A "*" CAPC1608X08L 15.2,-13 r180 top value=100nF (schematic designator C7)
C7B "*" CAPC1608X08L 16,12.2 r180 bottom value=100nF (schematic designator C7)
C8A "*" CAPC1608X08L 10.8,-22.1 r90 bottom value=100nF (schematic designator C8)
C8B "*" CAPC1608X08L 4.7,23.2 r90 bottom value=100nF (schematic designator C8)
C9A "*" CAPC1608X08L 16.1,-19.7 r90 top value=100nF (schematic designator C9)
C9B "*" CAPC1608X08L 14.2,19.8 r0 bottom value=100nF (schematic designator C9)
C10A "*" CAPC1608X08L 5.7,-20.9 r90 bottom value=100nF (schematic designator C10)
C10B "*" CAPC1608X08L 11.4,22.2 r180 bottom value=100nF (schematic designator C10)
C11A "*" CAPC1608X08L -5.926,-19.326 r90 bottom value=100nF (schematic designator C11)
C11B "*" CAPC1608X08L -7,22.6 r90 bottom value=100nF (schematic designator C11)
C12A "*" CAPC1608X08L 4.975,-19.497 r90 top value=100nF (schematic designator C12)
C12B "*" CAPC1608X08L -8.25,-15.55 r90 top value=100nF (schematic designator C12)
C12C "*" CAPC1608X08L -4,19.5 r270 top value=100nF (schematic designator C12)
C12D "*" CAPC1608X08L -16,14.96 r270 top value=100nF (schematic designator C12)
C13A "*" CAPC1608X08L 4.725,-16.997 r180 top value=100nF (schematic designator C13)
C13B "*" CAPC1608X08L -8.5,-13.05 r180 top value=100nF (schematic designator C13)
C13C "*" CAPC1608X08L -3.75,17 r0 top value=100nF (schematic designator C13)
C13D "*" CAPC1608X08L -15.75,12.46 r0 top value=100nF (schematic designator C13)
C14 "*" CAPC1608X08L 18,4.6 r270 top value=100nF
C15 "*" CAPC1608X08L -51.4,28.7 r270 top value=100nF
C16 "*" CAPC1608X08L -47.6,19.4 r90 top value=100nF
C17 "*" CAPC2012X15M -49.5,21.775 r270 top value=10uF
C18 "*" CAPC1608X08L -58.1,19.6 r90 top value=100nF
C19 "*" CAPC1608X08L -47.1,12.3 r270 bottom value=100nF
D8A "*" SOT95P237X112-3M 10.05,-12.05 r180 top (schematic designator D8)
D8B "*" SOT95P237X112-3M 6.95,11.65 r0 bottom (schematic designator D8)
FID1 "*" FIDRT 32.5,-32.5 r90 bottom
FID2 "*" FIDRT 32.5,62.5 r90 bottom
FID3 "*" FIDRT -62.5,62.5 r90 bottom
FID4 "*" FIDRT 32.5,-32.5 r90 top
FID5 "*" FIDRT 32.5,62.5 r90 top
FID6 "*" FIDRT -62.5,62.5 r90 top
J1A "P1_BATT IN" 39-31-0020 1.225,-21.497 r0 bottom (schematic designator J1)
J1B "P2_BATT IN" 39-31-0020 -12,-17.55 r0 bottom (schematic designator J1)
J1C "S1_BATT IN" 39-31-0020 -0.25,21.5 r180 bottom (schematic designator J1)
J1D "S2_BATT IN" 39-31-0020 -12.25,16.96 r180 bottom (schematic designator J1)
J2 "Mag Con" B06B-PASK-1 20.1,0 r180 top
J3A "P1_OUT" B2P-VH 1.475,-10.037 r270 top (schematic designator J3)
J3B "P2_OUT" B2P-VH -11.75,-6.09 r270 top (schematic designator J3)
J3C "S1_OUT" B2P-VH -0.5,10.04 r90 top (schematic designator J3)
J3D "S2_OUT" B2P-VH -12.5,5.5 r90 top (schematic designator J3)
J4A "Ancillaries" FH12-10S-0_5SH -47.1,-25.2 r90 top (schematic designator J4)
J4B "Ancillaries" FH12-10S-0_5SH -47,-9.1 r90 top (schematic designator J4)
J5A "Ancillaries" FH12-10S-0_5SH -21.2,-7.95 r270 top (schematic designator J5)
J5B "Ancillaries" FH12-10S-0_5SH -21.2,7.95 r270 top (schematic designator J5)
J6 "CAN To Main PCB" B06B-PASK-1 -44.2,15.7 r90 top
J7A "Serial Debug" B04B-PASK-1 -56.8,-17.9 r0 top (schematic designator J7)
J7B "Serial Debug" B04B-PASK-1 -56.7,-1.8 r0 top (schematic designator J7)
J8A "TC2030-IDC TAG CONNECT PADS" TC2030-IDC-NL 10.8,-23.9 r180 top (schematic designator J8)
J8B "TC2030-IDC Tag Connect Pads" TC2030-IDC-NL 11.29,23.885 r180 top (schematic designator J8)
J9 "Serial" B04B-PASK-1 -62.4,15.6 r90 top
J10 "9V Battery" B03B-PASK-1 -58.5,29.7 r0 top
LED1A "Visual Status Indicator" ASMB-MTB0-0A3A2 -6.5,-23 r180 top (schematic designator LED1)
LED1B "Visual Status Indicator" ASMB-MTB0-0A3A2 -6.25,23.5 r0 top (schematic designator LED1)
LED2A "ON" CAPCP2012X11N 4.225,-13.497 r90 bottom (schematic designator LED2)
LED2B "ON" CAPCP2012X11N -9,-9.55 r90 bottom (schematic designator LED2)
LED2C "ON" CAPCP2012X11N -3.25,13.5 r270 bottom (schematic designator LED2)
LED2D "ON" CAPCP2012X11N -15.25,8.96 r270 bottom (schematic designator LED2)
Q1A "Power Switch" MLPAK33_SOT8002-1_NEX-M -2.025,-18.225 r90 top (schematic designator Q1)
Q1B "Power Switch" MLPAK33_SOT8002-1_NEX-M -15.25,-14.225 r90 top (schematic designator Q1)
Q1C "Power Switch" MLPAK33_SOT8002-1_NEX-M 3,18.225 r270 top (schematic designator Q1)
Q1D "Power Switch" MLPAK33_SOT8002-1_NEX-M -9,13.71 r270 top (schematic designator Q1)
Q3A "BSS138" FAIR-SOT23-3_V -1.525,-13.497 r270 bottom (schematic designator Q3)
Q3B "BSS138" FAIR-SOT23-3_V -14.75,-9.55 r270 bottom (schematic designator Q3)
Q3C "BSS138" FAIR-SOT23-3_V 2.5,13.5 r90 bottom (schematic designator Q3)
Q3D "BSS138" FAIR-SOT23-3_V -9.5,8.96 r90 bottom (schematic designator Q3)
Q6A "Reverse Polarity Protection" MLPAK33_SOT8002-1_NEX-M -2.025,-22.747 r270 top (schematic designator Q6)
Q6B "Reverse Polarity Protection" MLPAK33_SOT8002-1_NEX-M -15.25,-18.75 r270 top (schematic designator Q6)
Q6C "Reverse Polarity Protection" MLPAK33_SOT8002-1_NEX-M 3,22.75 r90 top (schematic designator Q6)
Q6D "Reverse Polarity Protection" MLPAK33_SOT8002-1_NEX-M -9.025,18.25 r90 top (schematic designator Q6)
R1A "RESISTOR" RESC1608X06L -2.725,-18.537 r90 bottom value=10K (schematic designator R1)
R1B "RESISTOR" RESC1608X06L -15.95,-14.59 r90 bottom value=10K (schematic designator R1)
R1C "RESISTOR" RESC1608X06L 3.7,18.54 r270 bottom value=10K (schematic designator R1)
R1D "RESISTOR" RESC1608X06L -8.3,14 r270 bottom value=10K (schematic designator R1)
R2A "*" RESC1608X06L 1.275,-21.037 r180 top value=30K (schematic designator R2)
R2B "*" RESC1608X06L -11.95,-17.09 r180 top value=30K (schematic designator R2)
R2C "*" RESC1608X06L -0.3,21.04 r0 top value=30K (schematic designator R2)
R2D "*" RESC1608X06L -12.3,16.5 r0 top value=30K (schematic designator R2)
R3A "RESISTOR" RESC1608X06L -1.775,-10.747 r180 bottom value=1K (schematic designator R3)
R3B "RESISTOR" RESC1608X06L -15,-6.8 r180 bottom value=1K (schematic designator R3)
R3C "RESISTOR" RESC1608X06L 2.75,10.75 r0 bottom value=1K (schematic designator R3)
R3D "RESISTOR" RESC1608X06L -9.25,6.21 r0 bottom value=1K (schematic designator R3)
R4A "*" RESC1608X06L 3.725,-19.497 r270 top value=10K (schematic designator R4)
R4B "*" RESC1608X06L -9.5,-15.55 r270 top value=10K (schematic designator R4)
R4C "*" RESC1608X06L -2.75,19.5 r90 top value=10K (schematic designator R4)
R4D "*" RESC1608X06L -14.75,14.96 r90 top value=10K (schematic designator R4)
R5A "RESISTOR" RESC1608X06M -4.9,-24.5 r180 bottom value=39R (schematic designator R5)
R5B "RESISTOR" RESC1608X06M -8.5,23.2 r90 top value=39R (schematic designator R5)
R6A "RESISTOR" RESC1608X06M -8.75,-23.625 r270 top value=39R (schematic designator R6)
R6B "RESISTOR" RESC1608X06M -4,24.5 r90 top value=39R (schematic designator R6)
R7A "RESISTOR" RESC1608X06M -7.25,-19.25 r270 top value=240R (schematic designator R7)
R7B "RESISTOR" RESC1608X06M -5.5,19.4 r90 top value=240R (schematic designator R7)
R8A "RESISTOR" RESC1608X06L 13.1,-22 r180 bottom value=4K7 (schematic designator R8)
R8B "RESISTOR" RESC1608X06L 14,21.7 r270 bottom value=4K7 (schematic designator R8)
R9A "RESISTOR" RESC1608X06L 17.35,-19.15 r270 top value=4K7 (schematic designator R9)
R9B "RESISTOR" RESC1608X06L 17.9,18.7 r90 top value=4K7 (schematic designator R9)
R10A "RESISTOR" RESC1608X06L 18.8,-15.3 r180 top value=10K (schematic designator R10)
R10B "RESISTOR" RESC1608X06L 18.7,13.9 r180 bottom value=10K (schematic designator R10)
R11A "*" RESC1608X06L 4.725,-8.497 r180 top value=30K (schematic designator R11)
R11B "*" RESC1608X06L -8.5,-4.55 r180 top value=30K (schematic designator R11)
R11C "*" RESC1608X06L -3.75,8.5 r0 top value=30K (schematic designator R11)
R11D "*" RESC1608X06L -15.75,3.96 r0 top value=30K (schematic designator R11)
R12A "*" RESC1608X06L 4.725,-15.747 r0 top value=10K (schematic designator R12)
R12B "*" RESC1608X06L -8.5,-11.8 r0 top value=10K (schematic designator R12)
R12C "*" RESC1608X06L -3.75,15.75 r180 top value=10K (schematic designator R12)
R12D "*" RESC1608X06L -15.75,11.21 r180 top value=10K (schematic designator R12)
R13 "Line Termination" RESC1608X06L 19.4,4.6 r270 top value=62R
R14 "*" RESC1608X06L 20.7,4.6 r270 top value=62R
R15 "RESISTOR" RESC1608X06L -59.4,18.9 r90 bottom value=10K
R16 "*" RESC1608X06L -46.4,14.7 r0 bottom value=62R
R17 "Line Termination" RESC1608X06L -46.4,16.7 r0 bottom value=62R
R22A "*" RESC1608X06L 4.225,-10.497 r90 bottom value=560R (schematic designator R22)
R22B "*" RESC1608X06L -9,-6.55 r90 bottom value=560R (schematic designator R22)
R22C "*" RESC1608X06L -3.25,10.5 r270 bottom value=560R (schematic designator R22)
R22D "*" RESC1608X06L -15.25,5.96 r270 bottom value=560R (schematic designator R22)
R37A "RESISTOR" RESC1608X06L -23.5,-8.25 r90 bottom value=10K (schematic designator R37)
R37B "RESISTOR" RESC1608X06L -22.2,8.9 r90 bottom value=10K (schematic designator R37)
SB1A "Leave Open For FTDI" 0603SolderLinkOpen -50.4,-18.4 r270 top (schematic designator SB1)
SB1B "Leave Open For FTDI" 0603SolderLinkOpen -50.2,-2.4 r270 top (schematic designator SB1)
SB6A "Primary = Open, Secondary = Closed" 0603SOLDERLINKOPEN 18.3,-11.1 r180 bottom (schematic designator SB6)
SB6B "Primary = Open, Secondary = Closed" 0603SOLDERLINKOPEN 19.1,12.9 r180 top (schematic designator SB6)
SW1A "Boot" SW_KSR -55,-26 r90 top (schematic designator SW1)
SW1B "Boot" SW_KSR -54.9,-9.9 r90 top (schematic designator SW1)
SW2A "Reset" SW_KSR -59.5,-26 r90 top (schematic designator SW2)
SW2B "Reset" SW_KSR -59.4,-9.9 r90 top (schematic designator SW2)
TP1A "GND" S1751-46R -19.3,-16.8 r135 top (schematic designator TP1)
TP1B "GND" S1751-46R -19.3,16.8 r45 bottom (schematic designator TP1)
TP2A "GND" S1751-46R -19.3,-16.8 r315 bottom (schematic designator TP2)
TP2B "GND" S1751-46R -19.3,16.8 r45 top (schematic designator TP2)
TP3A "TMS" TP1 6.6,-10 r90 top (schematic designator TP3)
TP3B "TMS" TP1 16.2,11.7 r90 top (schematic designator TP3)
TP4A "TMS" TP1 18.8,-13.5 r90 bottom (schematic designator TP4)
TP4B "TMS" TP1 19.775,14.65 r90 top (schematic designator TP4)
TP5A "TMS" TP1 19.9,-16.4 r90 bottom (schematic designator TP5)
TP5B "TMS" TP1 16.5,17.5 r90 bottom (schematic designator TP5)
TP6A "TMS" TP1 18.8,-17.4 r90 bottom (schematic designator TP6)
TP6B "TMS" TP1 16.5,19 r90 bottom (schematic designator TP6)
TP7A "TP7A used as camera enable" TP1 8.1,-10 r90 top (schematic designator TP7)
TP7B "TP7A used as camera enable" TP1 12.4,12 r90 bottom (schematic designator TP7)
TP8A "TMS" TP1 19.9,-14.7 r90 bottom (schematic designator TP8)
TP8B "TMS" TP1 18.1,15.5 r90 top (schematic designator TP8)
TP9A "TMS" TP1 21.2,-15.5 r90 bottom (schematic designator TP9)
TP9B "TMS" TP1 19.75,16.337 r90 top (schematic designator TP9)
TP10A "TMS" TP1 8.3,-20.1 r90 bottom (schematic designator TP10)
TP10B "TMS" TP1 4.5,25.6 r90 bottom (schematic designator TP10)
TP11A "TMS" TP1 3.7,-25.5 r90 top (schematic designator TP11)
TP11B "TMS" TP1 5.5,18.5 r90 top (schematic designator TP11)
TP13A "TMS" TP1 15,-21.3 r90 top (schematic designator TP13)
TP13B "TMS" TP1 14,22.4 r90 top (schematic designator TP13)
TP16A "GND" S1751-46R 24.25,-3.5 r180 bottom (schematic designator TP16)
TP16B "GND" S1751-46R 24.25,4.5 r180 top (schematic designator TP16)
TP17 "TMS" TP1 -42.3,16.7 r0 bottom
TP18 "TMS" TP1 -42.3,14.7 r0 bottom
TP19 "TMS" TP1 -57.7,18.3 r0 bottom
TP20 "TMS" TP1 -58.8,13 r0 bottom
TP21 "GND" S1751-46R -62,8 r0 bottom
TP22 "GND" S1751-46R -44,8 r180 bottom
U1A "Power On Reset" SOT95P280X145-5L 8.2,-22.5 r180 bottom (schematic designator U1)
U1B "Power On Reset" SOT95P280X145-5L 8.75,23.25 r90 bottom (schematic designator U1)
U2A "MIC5200-3.3YS" FP-SOT223-3LD-PL-1-IPC_C 11.5,-17.25 r0 top (schematic designator U2)
U2B "MIC5200-3.3YS" FP-SOT223-3LD-PL-1-IPC_C 11.175,17 r0 bottom (schematic designator U2)
U3A "CAN Transceiver" FP-DWV0008A-IPC_C 20.035,-8.601 r90 top (schematic designator U3)
U3B "CAN Transceiver" FP-DWV0008A-IPC_C 20,7 r270 bottom (schematic designator U3)
U4 "5V Regulator" SOT230P700X170-4M -46.2,27.5 r0 top
U5 "CAN Transceiver" FP-DWV0008A-IPC_C -52.8,15.7 r0 top
U6A "Microcontroller" FP-LQFP32-5V-MFG 13,-16 r90 bottom (schematic designator U6)
U6B "Microcontroller" FP-LQFP32-5V-MFG 12.25,16.75 r270 top (schematic designator U6)
Z1 "*" "Breakout - 3 hole - short route" -42,-14.6 r90 top
Z2 "*" "Breakout - 3 hole - short route" -53.5,4 r180 top
Z4 "*" "Breakout - 3 hole - short route" -51,32 r180 top
Z5 "*" "Breakout - 3 hole - short route" -41,20 r90 top
Z6 "*" "Breakout - 3 hole - short route" -53.5,6 r0 top

## Footprints (in the part's own frame and the unit in brackets; to place one, negate y for a bottom-side part, rotate by r counter-clockwise, add the part's x,y. Pads: shape width x height; smd on the part's side, far side on the other; paste and mask are expansions set on the pad)
39-31-0020 [mm] "Molex: 2W Mini-Fit Connector"
  round 2.4 hole 1.4: 1(0,2.75) 2(0,-2.75)
  silkscreen extent -3.35,-6.3 3.2,5.05, body extent -3.1,-6.2 3.1,4.8, height 12.81
0603SolderLinkOpen [mm] "0603 Solder Link - Open"
  rect 0.5x1 smd paste-0.5 mask+0.102: 1(-1.05,0)
  round 0.025 smd: 1(-0.587,0) 2(0.612,0)
  rect 0.5x1 smd paste-0.5: 2(1.05,0)
  Top Layer region: -1.3,0.5 -0.375,0.5 0.125,0 -0.375,-0.5 -1.3,-0.5
  Top Layer region: 1.3,-0.5 -0.075,-0.5 0.425,0 -0.075,0.5 1.3,0.5
  silkscreen extent -1.6,-0.8 1.6,0.8
0603SOLDERLINKOPEN [mm] "0603 Solder Link - Open"
  rect 0.5x1 smd paste-0.5 mask+0.102: 1(-1.05,0)
  round 0.025 smd: 1(-0.587,0) 2(0.612,0)
  rect 0.5x1 smd paste-0.5: 2(1.05,0)
  Top Layer region: -1.3,0.5 -0.375,0.5 0.125,0 -0.375,-0.5 -1.3,-0.5
  Top Layer region: 1.3,-0.5 -0.075,-0.5 0.425,0 -0.075,0.5 1.3,0.5
  silkscreen extent -1.6,-0.8 1.6,0.8
ASMB-MTB0-0A3A2 [mm] "PLCC-4 Tricolor Black Surface LED"
  rect 1.1x1.5 smd: 1(-0.75,-1.5) 2(-0.75,1.5) 3(0.75,1.5) 4(0.75,-1.5)
  silkscreen extent -1.75,-1.7 1.2,0.55, body extent -1.4,-1.75 1.4,1.75, height 1.91
B2P-VH [mil] "Connector JST VH series 2 way 3.96mm pitch"
  rect 112x112 hole 64.96: 1(0,0)
  round 112 hole 64.96: 2(155.91,0)
  silkscreen extent -77,-190 233,144, body extent -77,-190 232,145, height 430
B03B-PASK-1 [mm] "JST B04B-PASK-1 2mm Connector"
  round 1.6 hole 0.87: 1(2,0) 2(0,0) 3(-2,0)
  round 0 hole 1.1 unplated: 11(3.5,1.7)
  silkscreen extent -4,-3.1 4,2.2, body extent -4,-3.1 4,2.2, height 7.72
B04B-PASK-1 [mm] "JST B04B-PASK-1 2mm Connector"
  round 1.6 hole 0.87: 1(3,0) 2(1,0) 3(-1,0) 4(-3,0)
  round 0 hole 1.1 unplated: 11(4.5,1.7)
  silkscreen extent -5,-3.1 5,2.2, body extent -5,-3.1 5,2.2, height 7.7
B06B-PASK-1 [mm] "JST B07B-PASK-1 2mm Connector"
  round 1.6 hole 0.87: 1(5,0) 2(3,0) 3(1,0) 4(-1,0) 5(-3,0) 6(-5,0)
  round 0 hole 1.1 unplated: 11(6.5,1.7)
  silkscreen extent -7,-3.1 7,2.2, body extent -7,-3.1 7,2.2, height 7.72
"Breakout - 3 hole - short route" [mm]
  round 0 hole 0.8 unplated: 1(-1.2,0.2) 2(0,0.2) 3(1.2,0.2)
CAPC1608X08L [mm] "Chip Capacitor, 2-Leads, Body 1.6x0.8mm, IPC High Density"
  rect 0.85x0.8 smd: 1(-0.625,0) 2(0.625,0)
  body extent -0.8,-0.43 0.8,0.43, height 0.8
CAPC2012X15L [mm] "Chip Capacitor, 2-Leads, Body 2.0x1.3mm, IPC High Density"
  rect 1.1x1.4 smd: 1(-0.75,0) 2(0.75,0)
  silkscreen extent -0.05,-0.75 0.05,0.75, body extent -1,-0.63 1,0.64, height 1.47
CAPC2012X15M [mm] "Chip Capacitor, 2-Leads, Body 2.0x1.3mm, IPC Low Density"
  rect 1.55x1.6 smd: 1(-0.975,0) 2(0.975,0)
  silkscreen extent -2.17,-1.25 2.17,1.25, body extent -1,-0.64 1,0.63, height 1.47
CAPCP2012X11N [mm] "Chip Capacitor, 2-Leads, Body 2.0x1.3mm, IPC Medium Density"
  rect 1.1x1.4 smd: 1(-0.95,0) 2(0.95,0)
  silkscreen extent -2.04,-1.02 1.78,1.02, body extent -1,-0.63 1,0.64, height 1.12
FAIR-SOT23-3_V [mm] "SOT23, 3-Leads, Body 3.12x1.5mm, Pitch 0.95mm"
  rect 1.4x1 smd: 1(-1.1,0.95) 2(-1.1,-0.95) 3(1.1,0)
  silkscreen extent -1.22,-1.55 0.75,2.12, body extent -1.35,-1.56 1.35,1.56, height 1.2
FH12-10S-0_5SH [mm] "Hirose FH12 Series 10W FFC 0.5mm pitch connector"
  rect 1.8x2.2 smd: 0(-4.15,0) 0(4.15,0)
  rect 0.3x1.3 smd: 1(-2.25,3.25) 2(-1.75,3.25) 3(-1.25,3.25) 4(-0.75,3.25) 5(-0.25,3.25) 6(0.25,3.25) 7(0.75,3.25) 8(1.25,3.25) 9(1.75,3.25) 10(2.25,3.25)
  silkscreen extent -4.05,-3 4.05,3.23, body extent -4.55,-3 4.55,3.4, height 2.11
FIDRT [mil] "Fiducial 1mm round"
  round 40 smd paste-19.68 mask+20: 0(0,0)
  Top Layer keep-out circle w3.94: c0,0 r39.37
FP-DWV0008A-IPC_C [mm]
  rect 1.654x0.542 smd paste+0 mask+0: 1(-5.201,1.905)
  rrect100% 1.654x0.542 smd paste+0 mask+0: 2(-5.201,0.635) 3(-5.201,-0.635) 4(-5.201,-1.905) 5(5.201,-1.905) 6(5.201,-0.635) 7(5.201,0.635) 8(5.201,1.905)
  silkscreen extent -6.93,-2.93 3.87,2.93, body extent -6.13,-3.03 6.13,3.03, height 0.25
FP-LQFP32-5V-MFG [mm]
  rect 1.2x0.5 smd paste+0 mask+0: 1(-4.25,2.8) 2(-4.25,2) 3(-4.25,1.2) 4(-4.25,0.4) 5(-4.25,-0.4) 6(-4.25,-1.2) 7(-4.25,-2) 8(-4.25,-2.8) 17(4.25,-2.8) 18(4.25,-2) 19(4.25,-1.2) 20(4.25,-0.4) 21(4.25,0.4) 22(4.25,1.2) 23(4.25,2) 24(4.25,2.8)
  rect 0.5x1.2 smd paste+0 mask+0: 9(-2.8,-4.25) 10(-2,-4.25) 11(-1.2,-4.25) 12(-0.4,-4.25) 13(0.4,-4.25) 14(1.2,-4.25) 15(2,-4.25) 16(2.8,-4.25) 25(2.8,4.25) 26(2,4.25) 27(1.2,4.25) 28(0.4,4.25) 29(-0.4,4.25) 30(-1.2,4.25) 31(-2,4.25) 32(-2.8,4.25)
  silkscreen extent -5.57,-3.6 3.6,3.6, body extent -4.5,-4.5 4.5,4.5, height 1.6
FP-SOT223-3LD-PL-1-IPC_C [mm]
  rect 1.454x0.882 smd paste+0 mask+0: 1(-3.075,2.3)
  rrect100% 1.454x0.882 smd paste+0 mask+0: 2(-3.075,0) 3(-3.075,-2.3)
  rrect61% 1.454x3.182 smd paste+0 mask+0: 4(3.075,0)
  silkscreen extent -4.45,-3.25 1.6,3.25, body extent -3.5,-3.25 3.53,3.25, height 1.8
MLPAK33_SOT8002-1_NEX-M [mil]
  rect 32x12 smd paste+0 mask+0: 1(-69,38.39) 2(-69,12.8) 3(-69,-12.8) 4(-69,-38.39) 5(69,-38.39) 6(69,-12.8) 7(69,12.8) 8(69,38.39)
  Top Layer region: 57.98,-52 57.98,52 -32,52 -32,-52
  silkscreen extent -105,-69 66,69, body extent -69,-64 69,64, height 35
PCB [mm] "BOM Entry for PCB"
RESC1608X06L [mm] "Chip Resistor, 2-Leads, Body 1.6x0.8mm, IPC High Density"
  rect 0.8x0.9 smd: 1(-0.7,0) 2(0.7,0)
  silkscreen extent -0.1,-0.35 0.1,0.35, body extent -0.85,-0.48 0.85,0.48, height 0.55
RESC1608X06M [mm] "Chip Resistor, 2-Leads, Body 1.6x0.8mm, IPC Low Density"
  rect 1.2x1.1 smd: 1(-0.9,0) 2(0.9,0)
  silkscreen extent -1.83,-0.87 1.83,0.87, body extent -0.85,-0.48 0.85,0.47, height 0.55
S1751-46R [mm] "SM Testpoint - Harwin S1751-46R"
  rect 3.45x1.85 smd: 1(0,0)
  silkscreen extent -1.9,-1.1 1.9,1.1, body extent -1.58,-0.8 1.67,0.85, height 2
SOT95P237X112-3M [mm] "SOT23, 3-Leads, Body 3.0x2.6mm (max), Pitch 0.95mm, IPC Low Density"
  rect 1.9x0.6 smd: 1(-0.95,0.95) 2(-0.95,-0.95) 3(0.95,0)
  silkscreen extent -1.08,-1.5 0.7,1.92, body extent -1.25,-1.5 1.25,1.5, height 1.09
SOT95P280X145-5L [mm] "SOT23, 5-Leads, Body 3.0x3.0mm (max), Pitch 0.95mm, IPC High Density"
  rect 0.9x0.6 smd: 1(-1.2,0.95) 2(-1.2,0) 3(-1.2,-0.95) 4(1.2,-0.95) 5(1.2,0.95)
  silkscreen extent -1.7,-1.5 0.35,1.7, body extent -1.6,-1.55 1.6,1.55, height 1.45
SOT230P700X170-4M [mm] "SOT223, 4-Leads, Body 6.7x7.3mm (max), Pitch 2.30mm, IPC Low Density"
  rect 2.7x0.9 smd: 1(-2.95,2.3) 2(-2.95,0) 3(-2.95,-2.3)
  rect 2.7x3.3 smd: 4(2.95,0)
  silkscreen extent -3.05,-3.35 1.2,3.35, body extent -3.48,-3.25 3.48,3.25, height 1.69
SW_KSR [mm] "Switch SMD SPST-NO Vertical ITT/Cannon KSR231GLFS"
  rect 1x1.4 smd: 1(-3.5,0) 2(3.5,0)
  silkscreen extent -3,-1.9 3,1.9, body extent -3.65,-1.95 3.65,1.95, height 2.5
TC2030-IDC-NL [mm] "Tag-Connect 6-Pin with no legs (PN# TC2030-IDC-NL)"
  round 0.9 hole 0.995: 0(0,0) 0(5.08,-1.016) 0(5.08,1.016)
  round 0.79 smd paste-0.39: 1(1.27,-0.635) 2(1.27,0.635) 3(2.54,-0.635) 4(2.54,0.635) 5(3.81,-0.635) 6(3.81,0.635)
  silkscreen extent -0.64,-1.91 5.71,1.91
TP1 [mm]
  round 1 smd paste-0.5: 1(0,0)